# Altium PCB 175-00024_rev1, Backplane, Instrument Crate.PcbDoc (part 1 of 4)
Units mil, origin at the board's own origin, x right, y up, seen from the top; angles counter-clockwise.
Board outline 8400 x 10183.07 mil, 8 copper layers (Top Layer (*.GTL), Mid-Layer 1 (*.G1), +24V (*.GP1), RTN (*.GP2), +3.3V (*.GP3), +12V (*.GP4), Signal GND (*.GP5), Bottom Layer (*.GBL)); 192 components, 150 nets, 1439 pads, 415 vias.
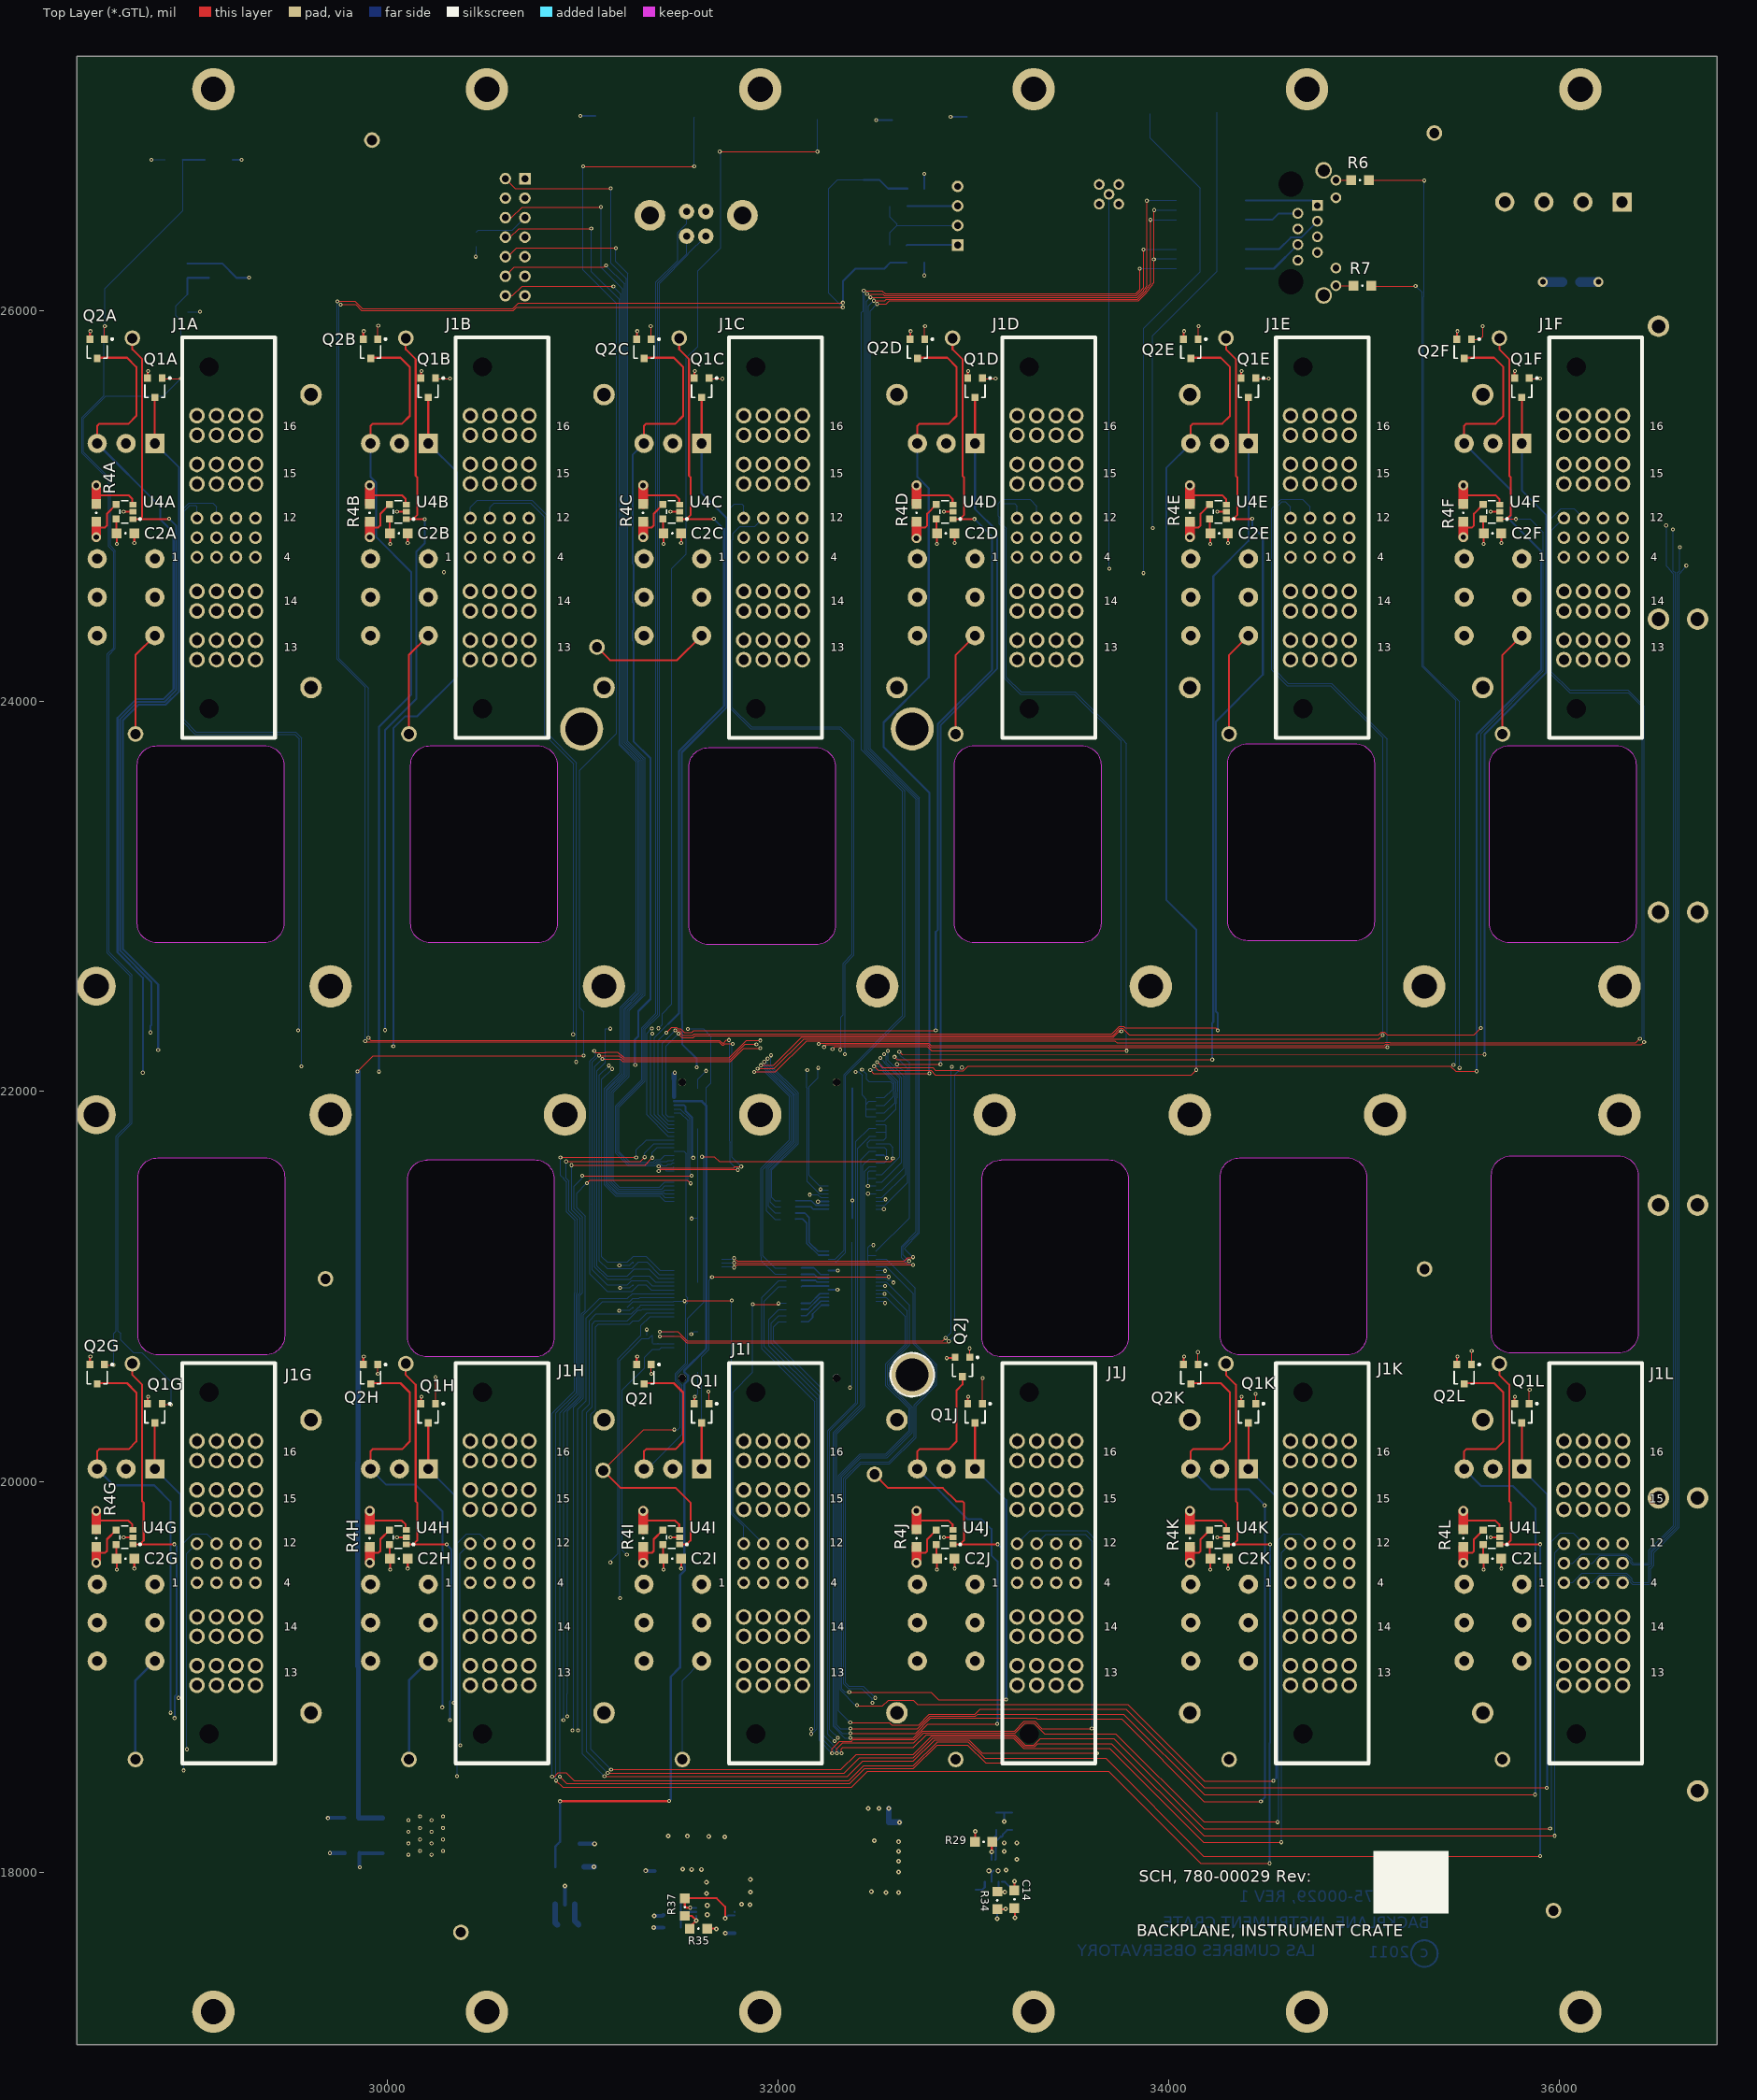
[diagram p0: Top Layer (*.GTL) view]
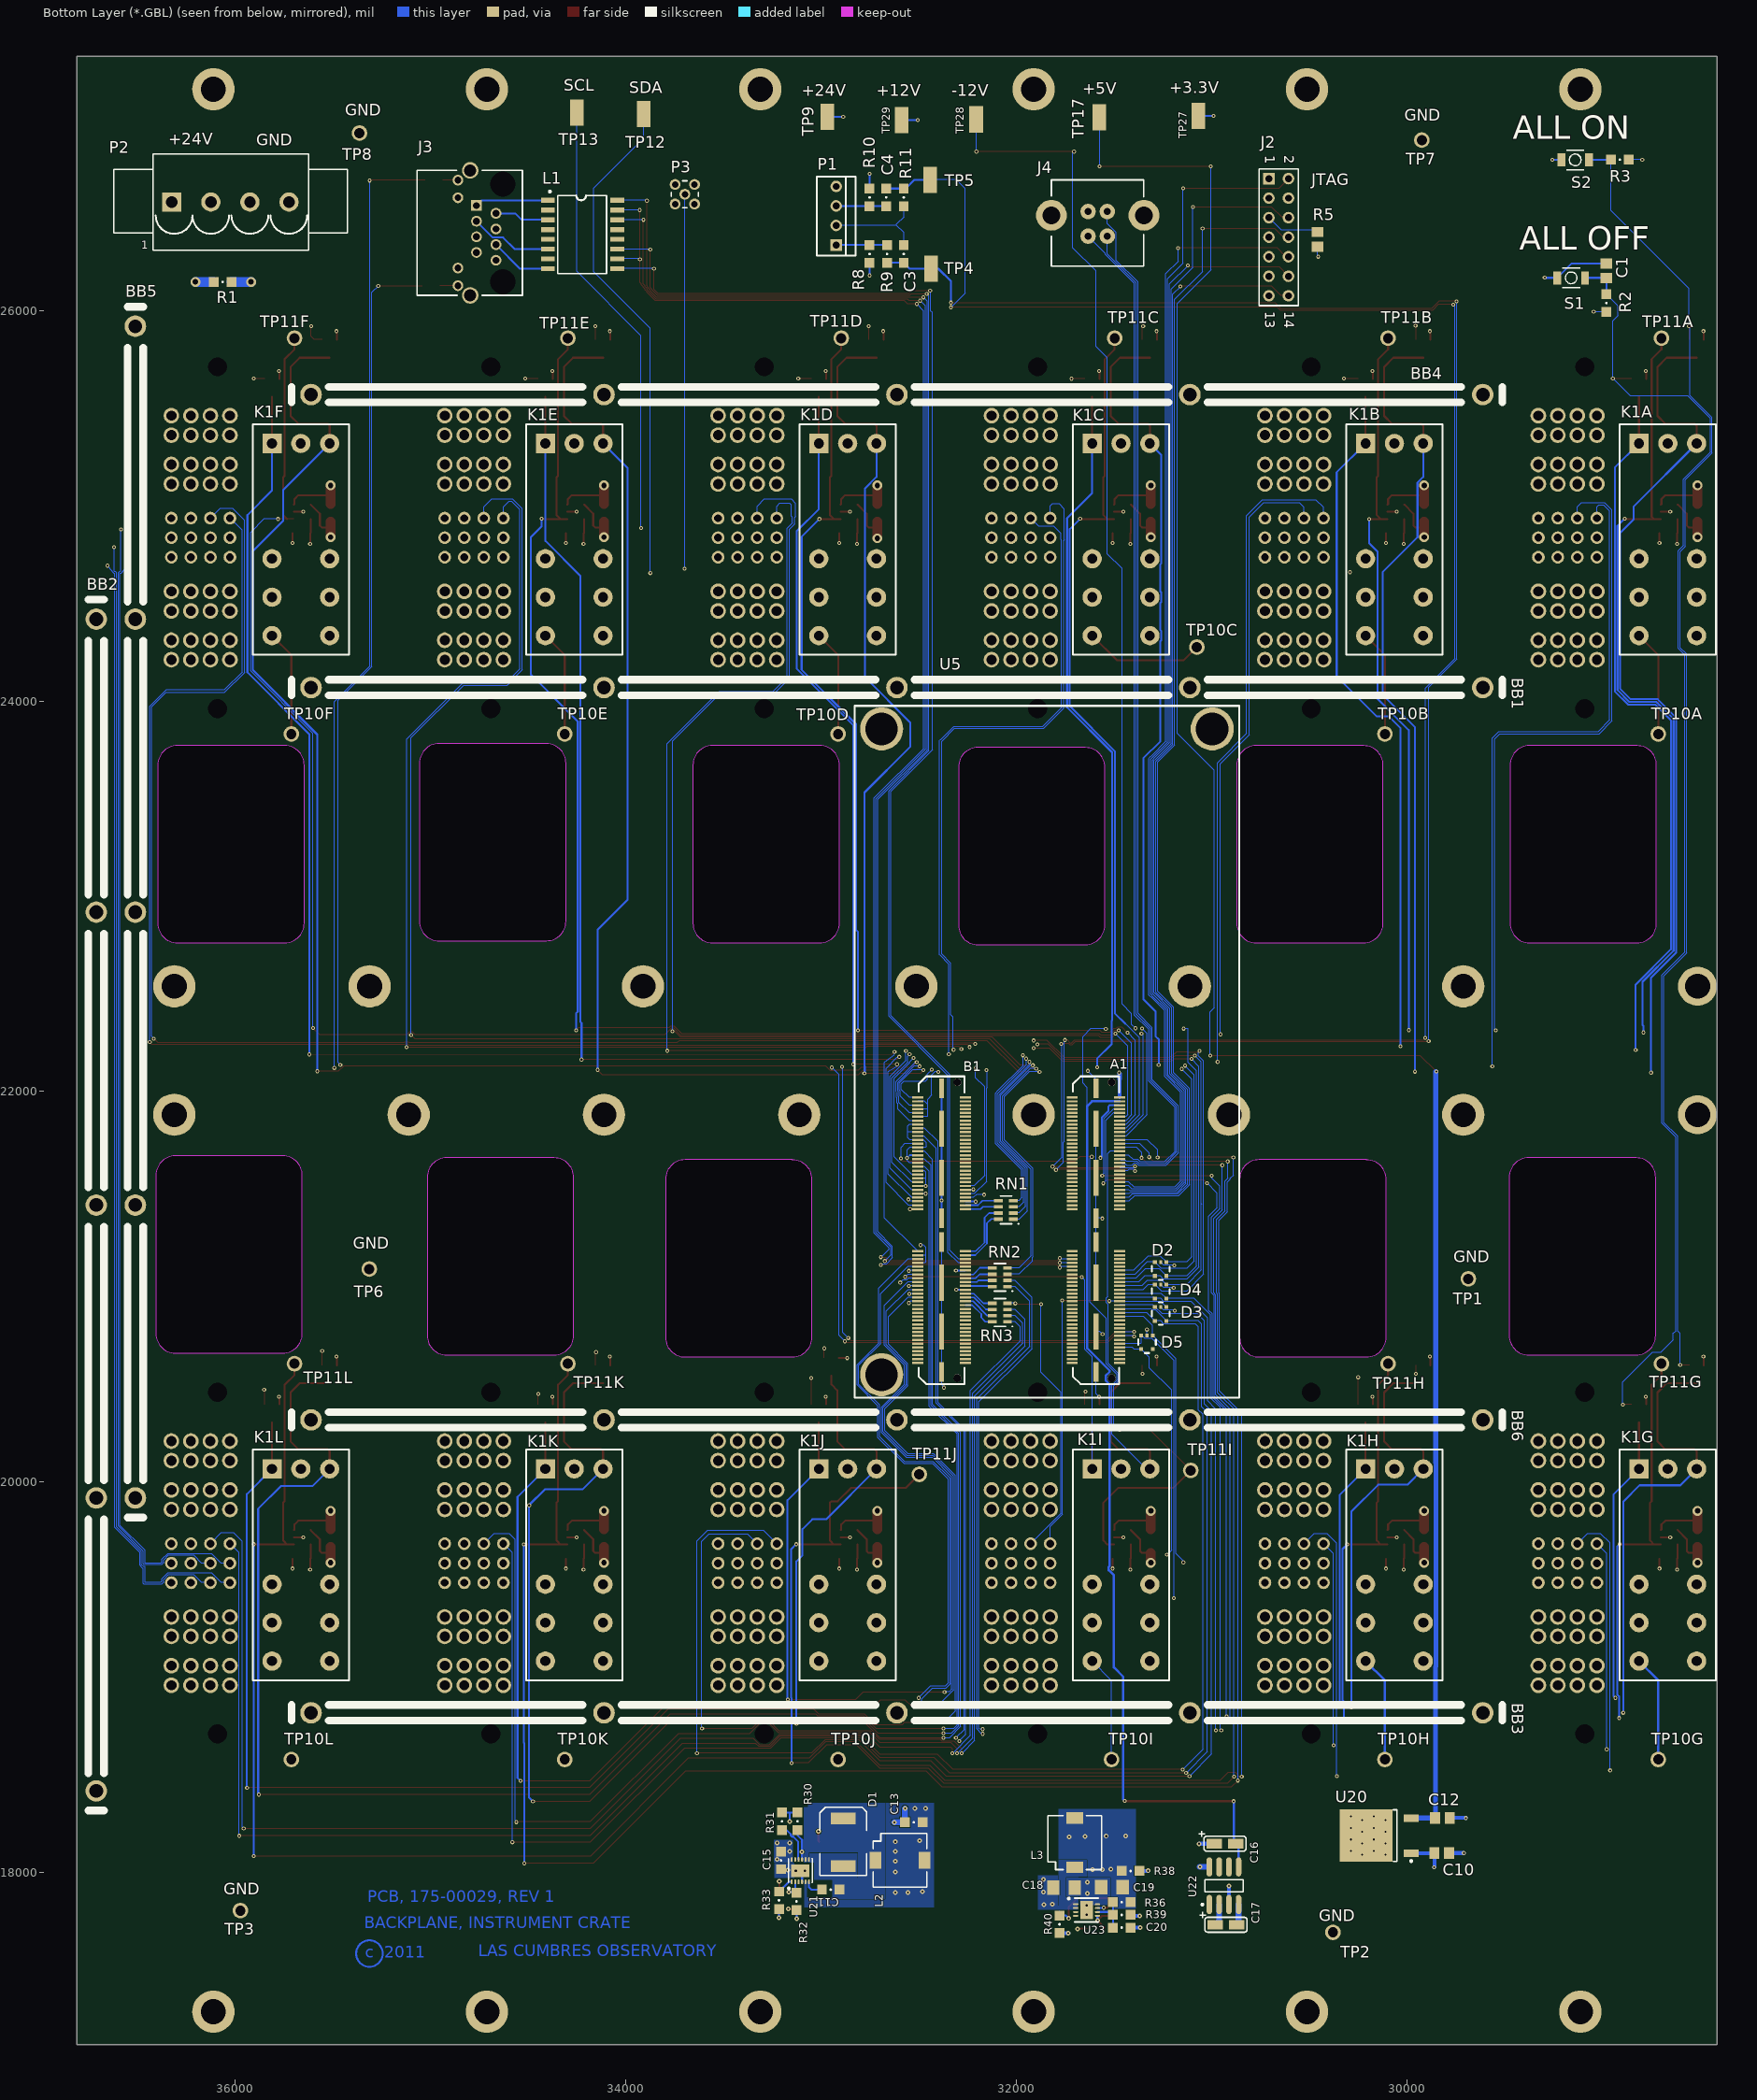
[diagram p1: Bottom Layer (*.GBL) view, seen from below]
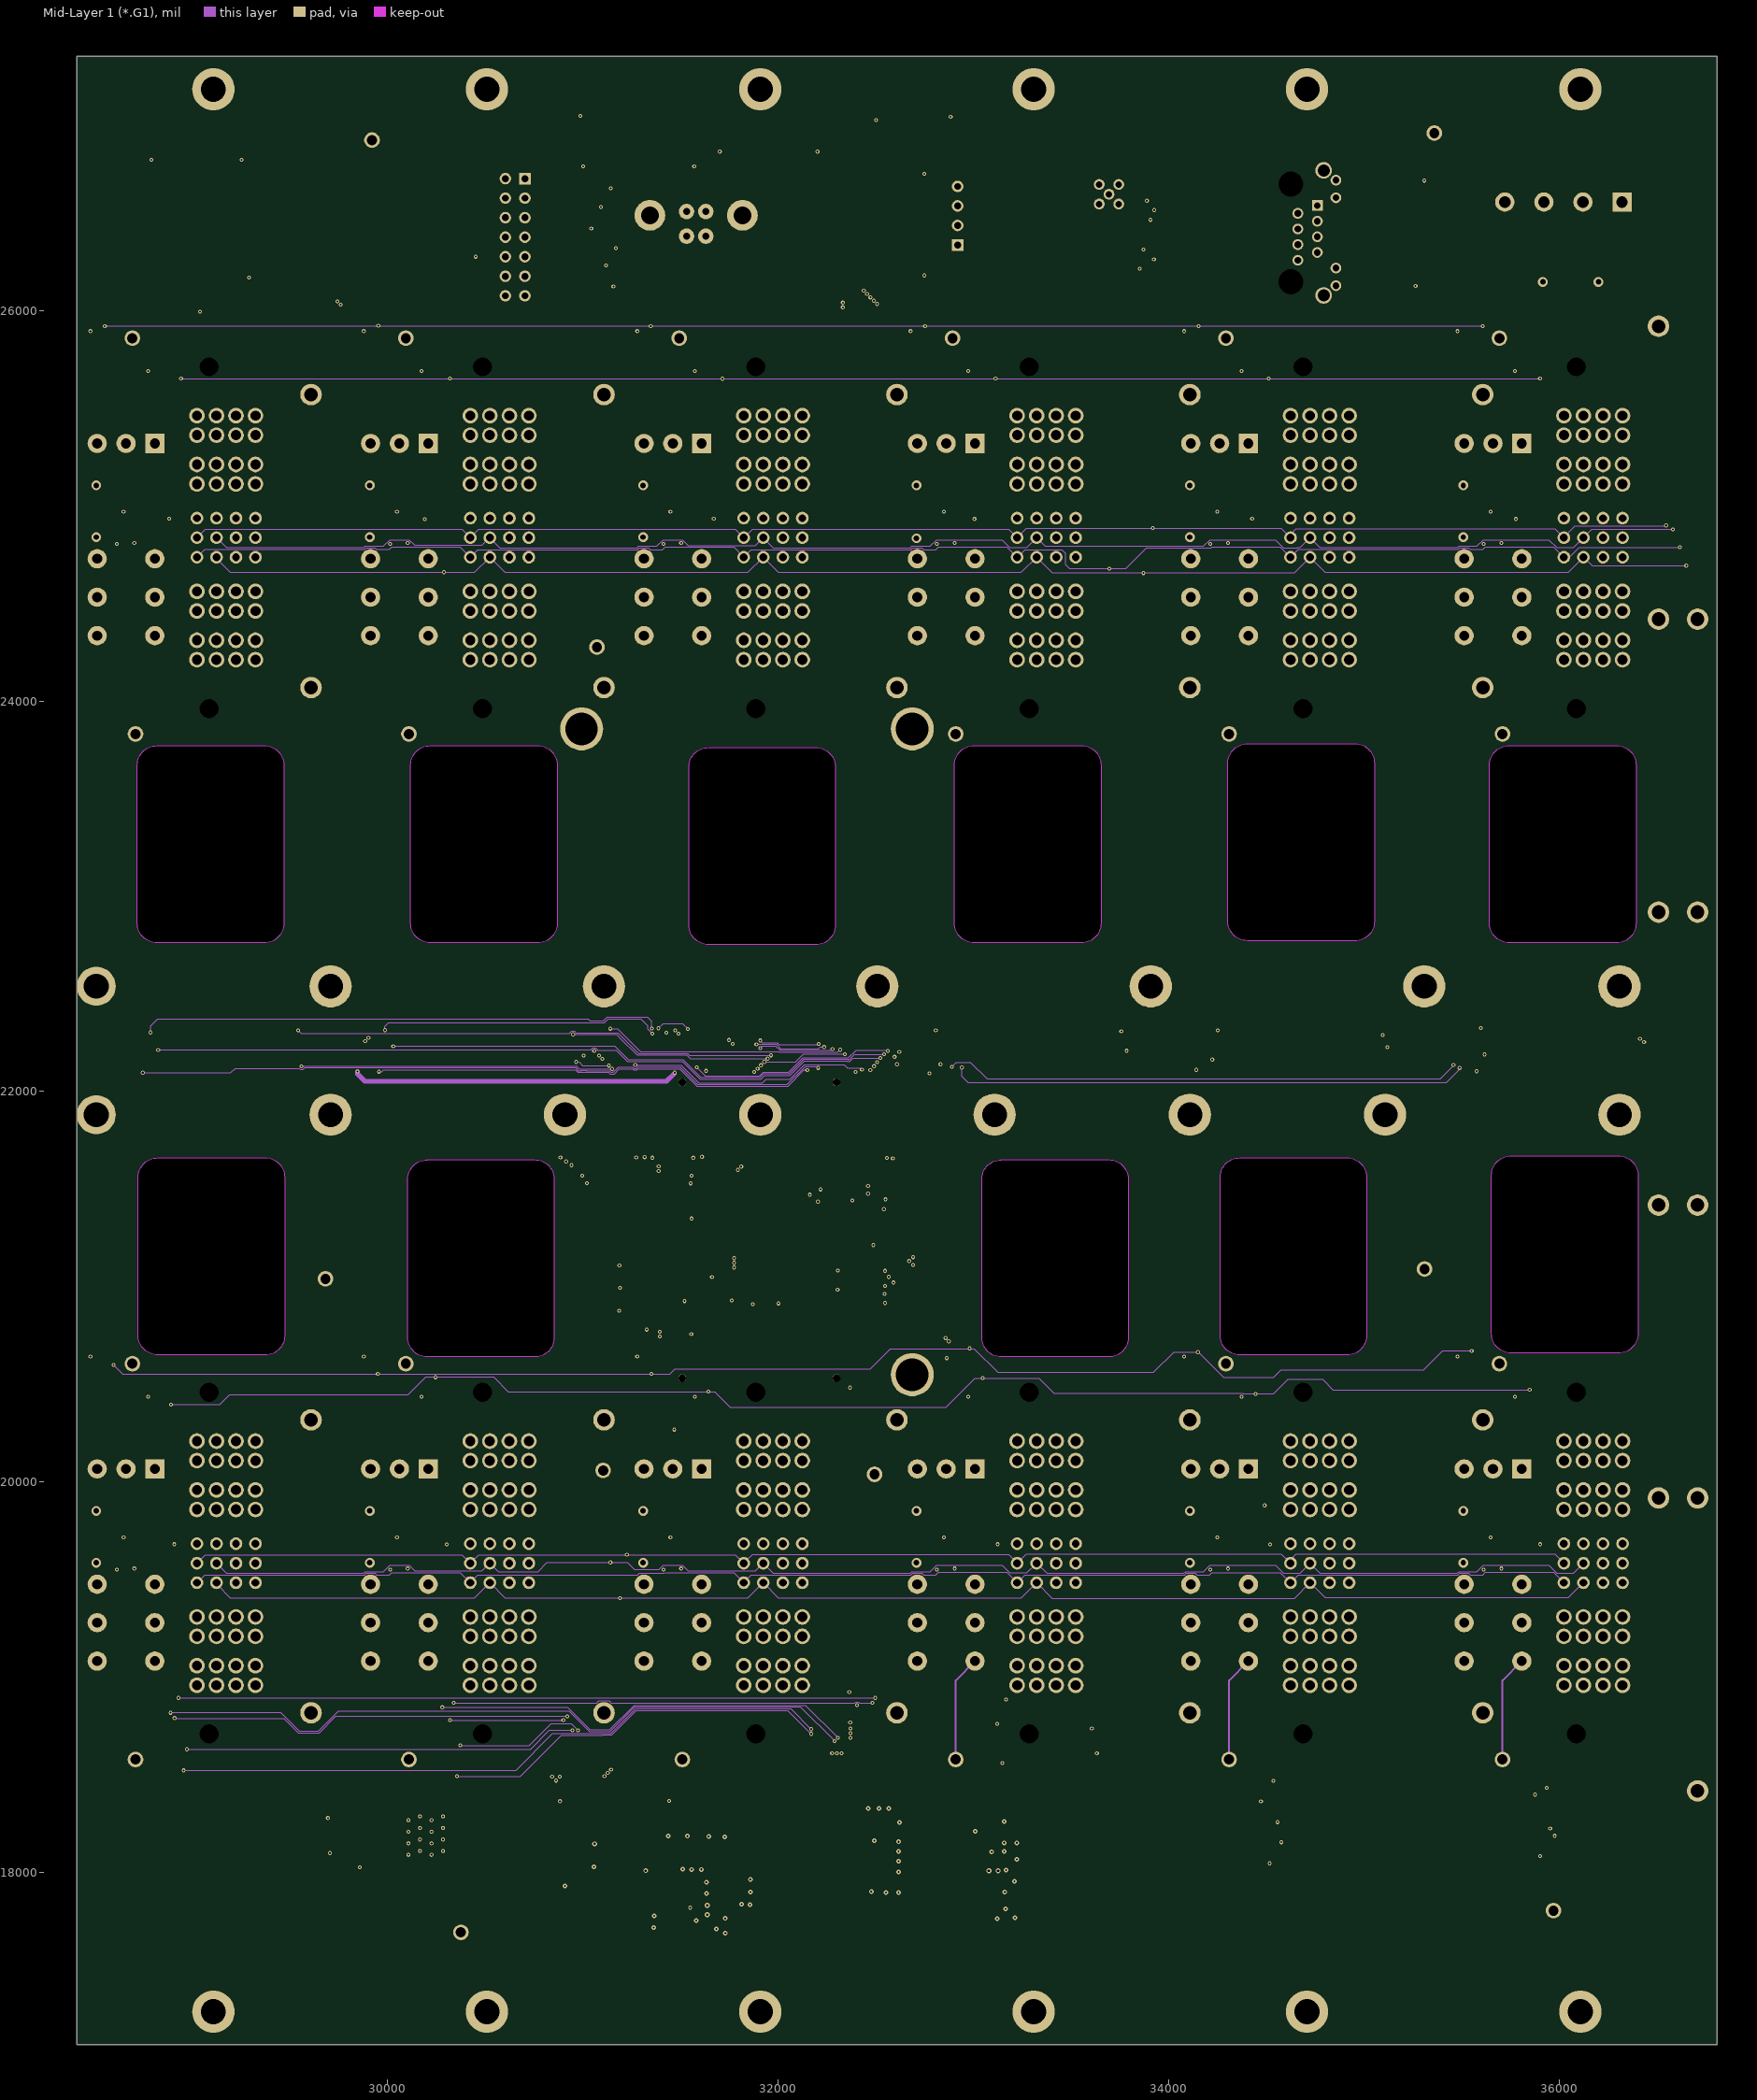
[diagram p2: Mid-Layer 1 (*.G1)]
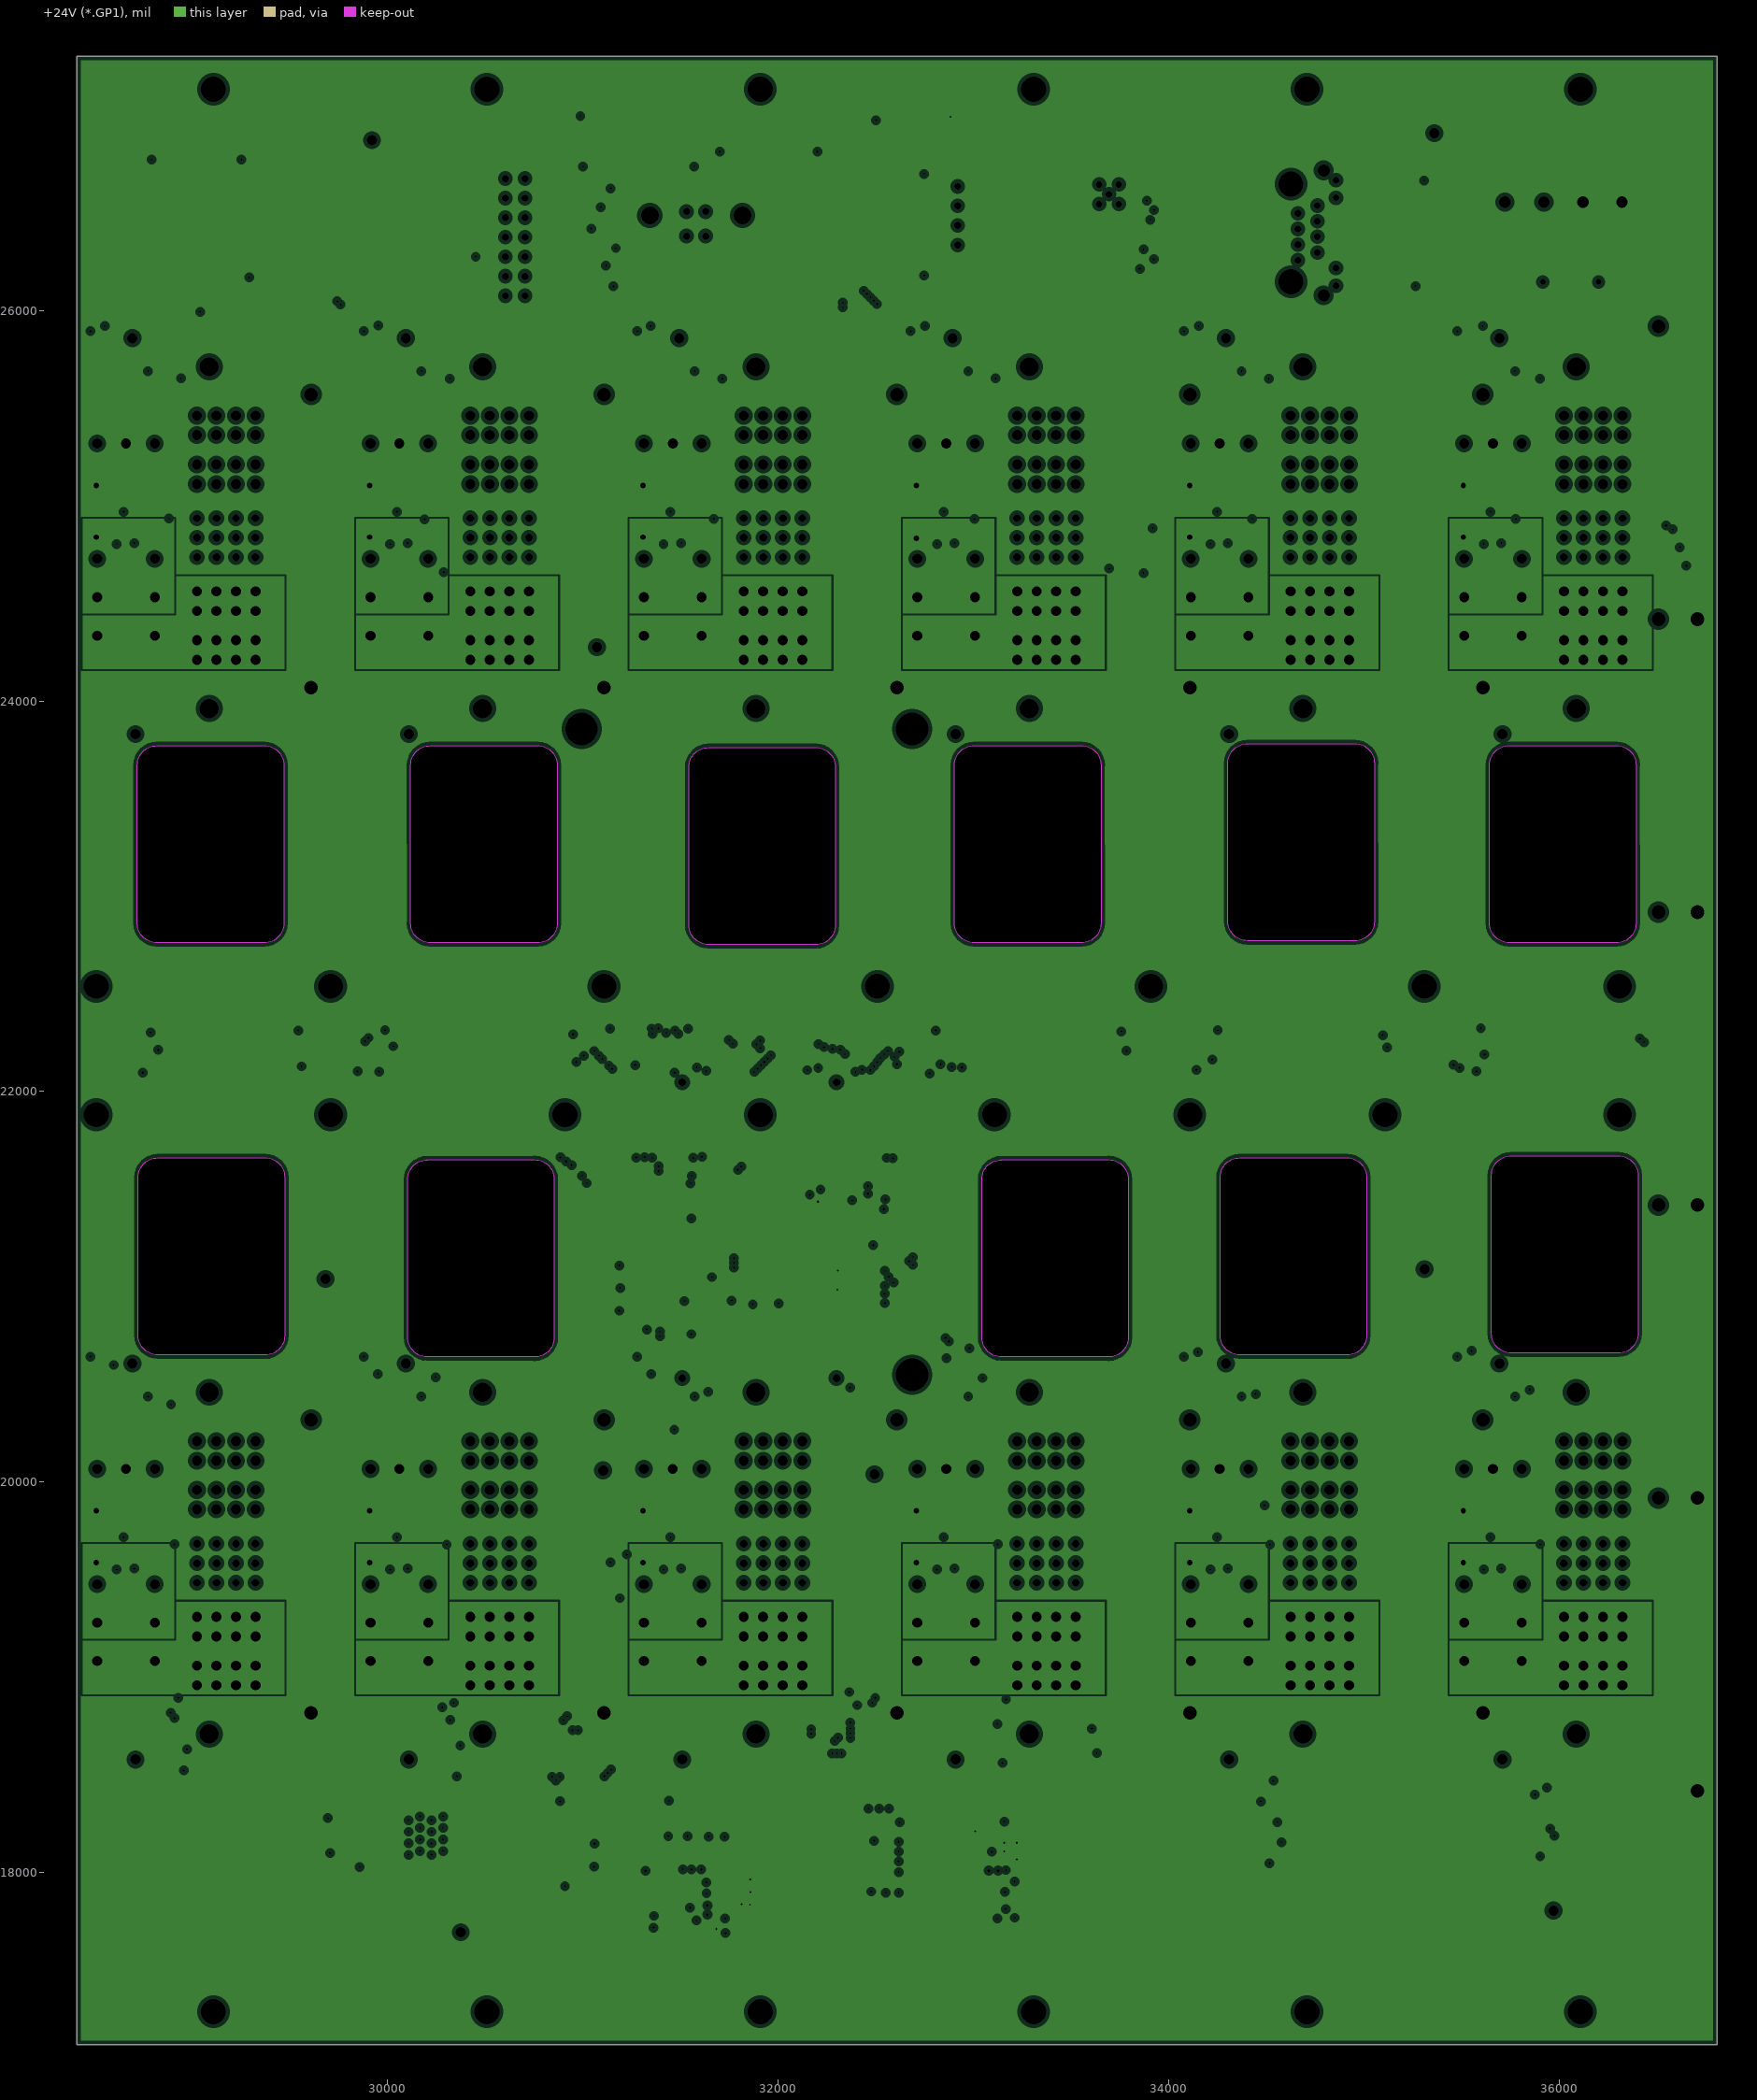
[diagram p3: +24V (*.GP1), clearances drawn from the general rule]
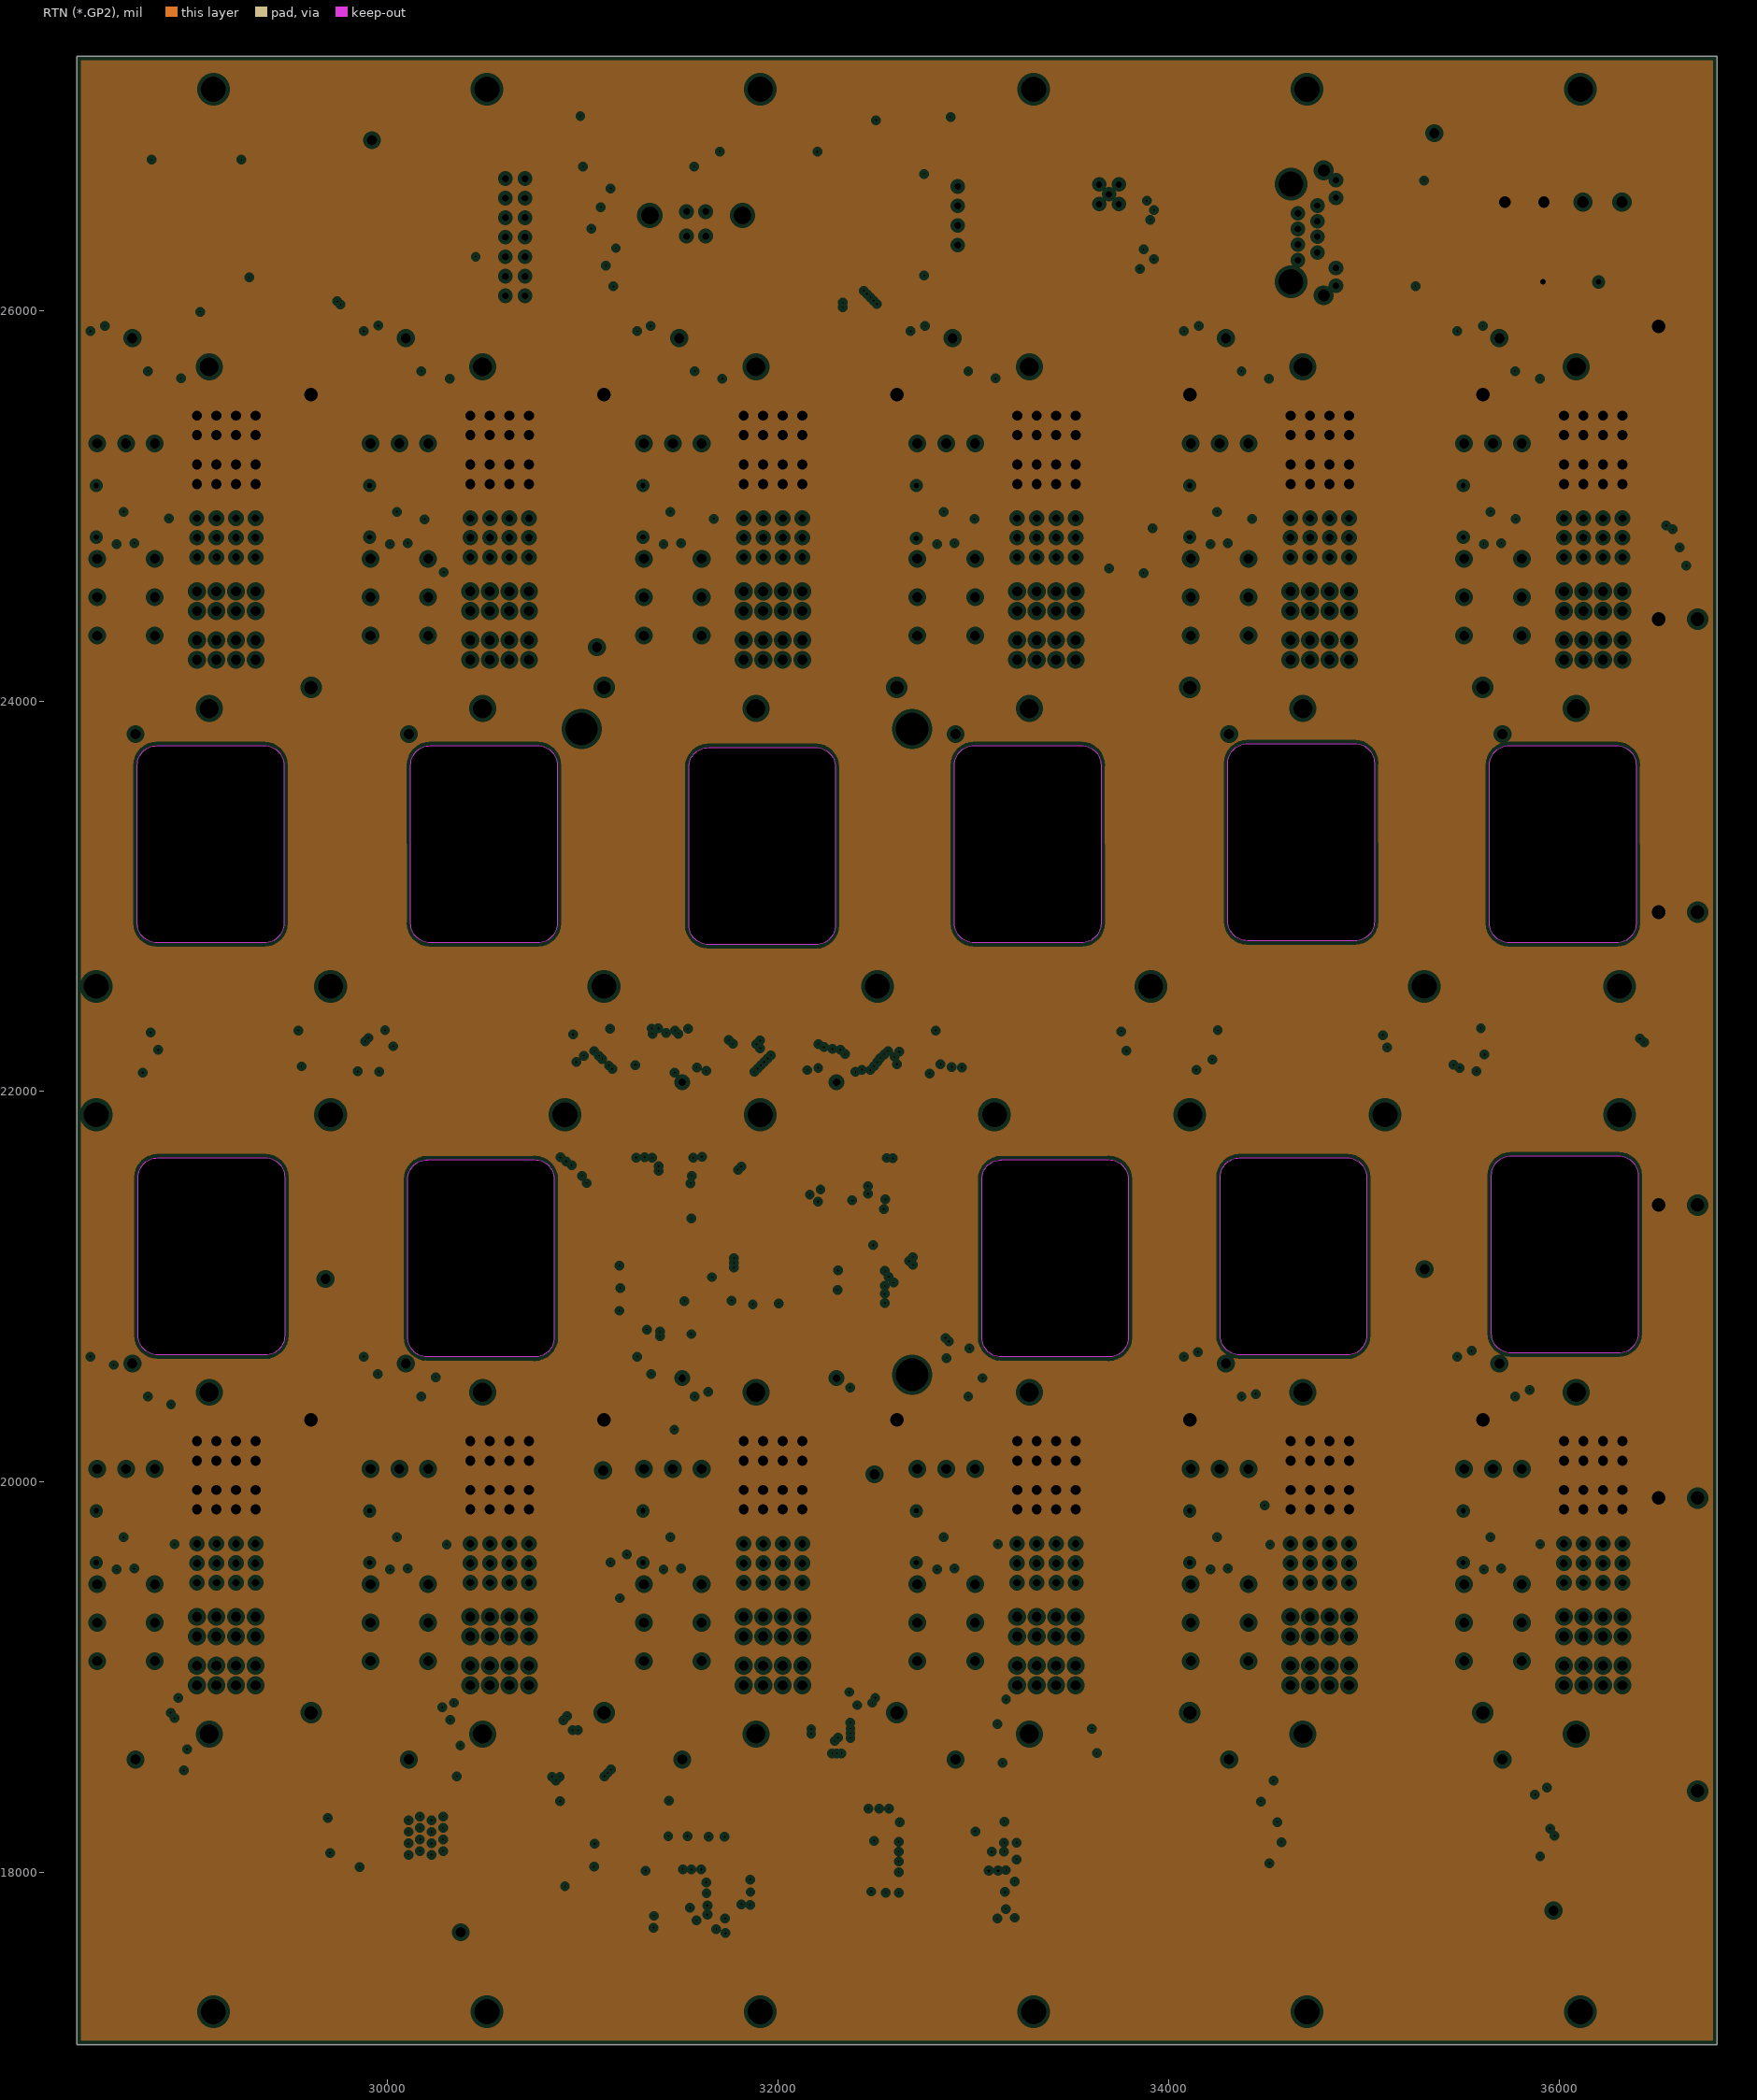
[diagram p4: RTN (*.GP2), clearances drawn from the general rule]
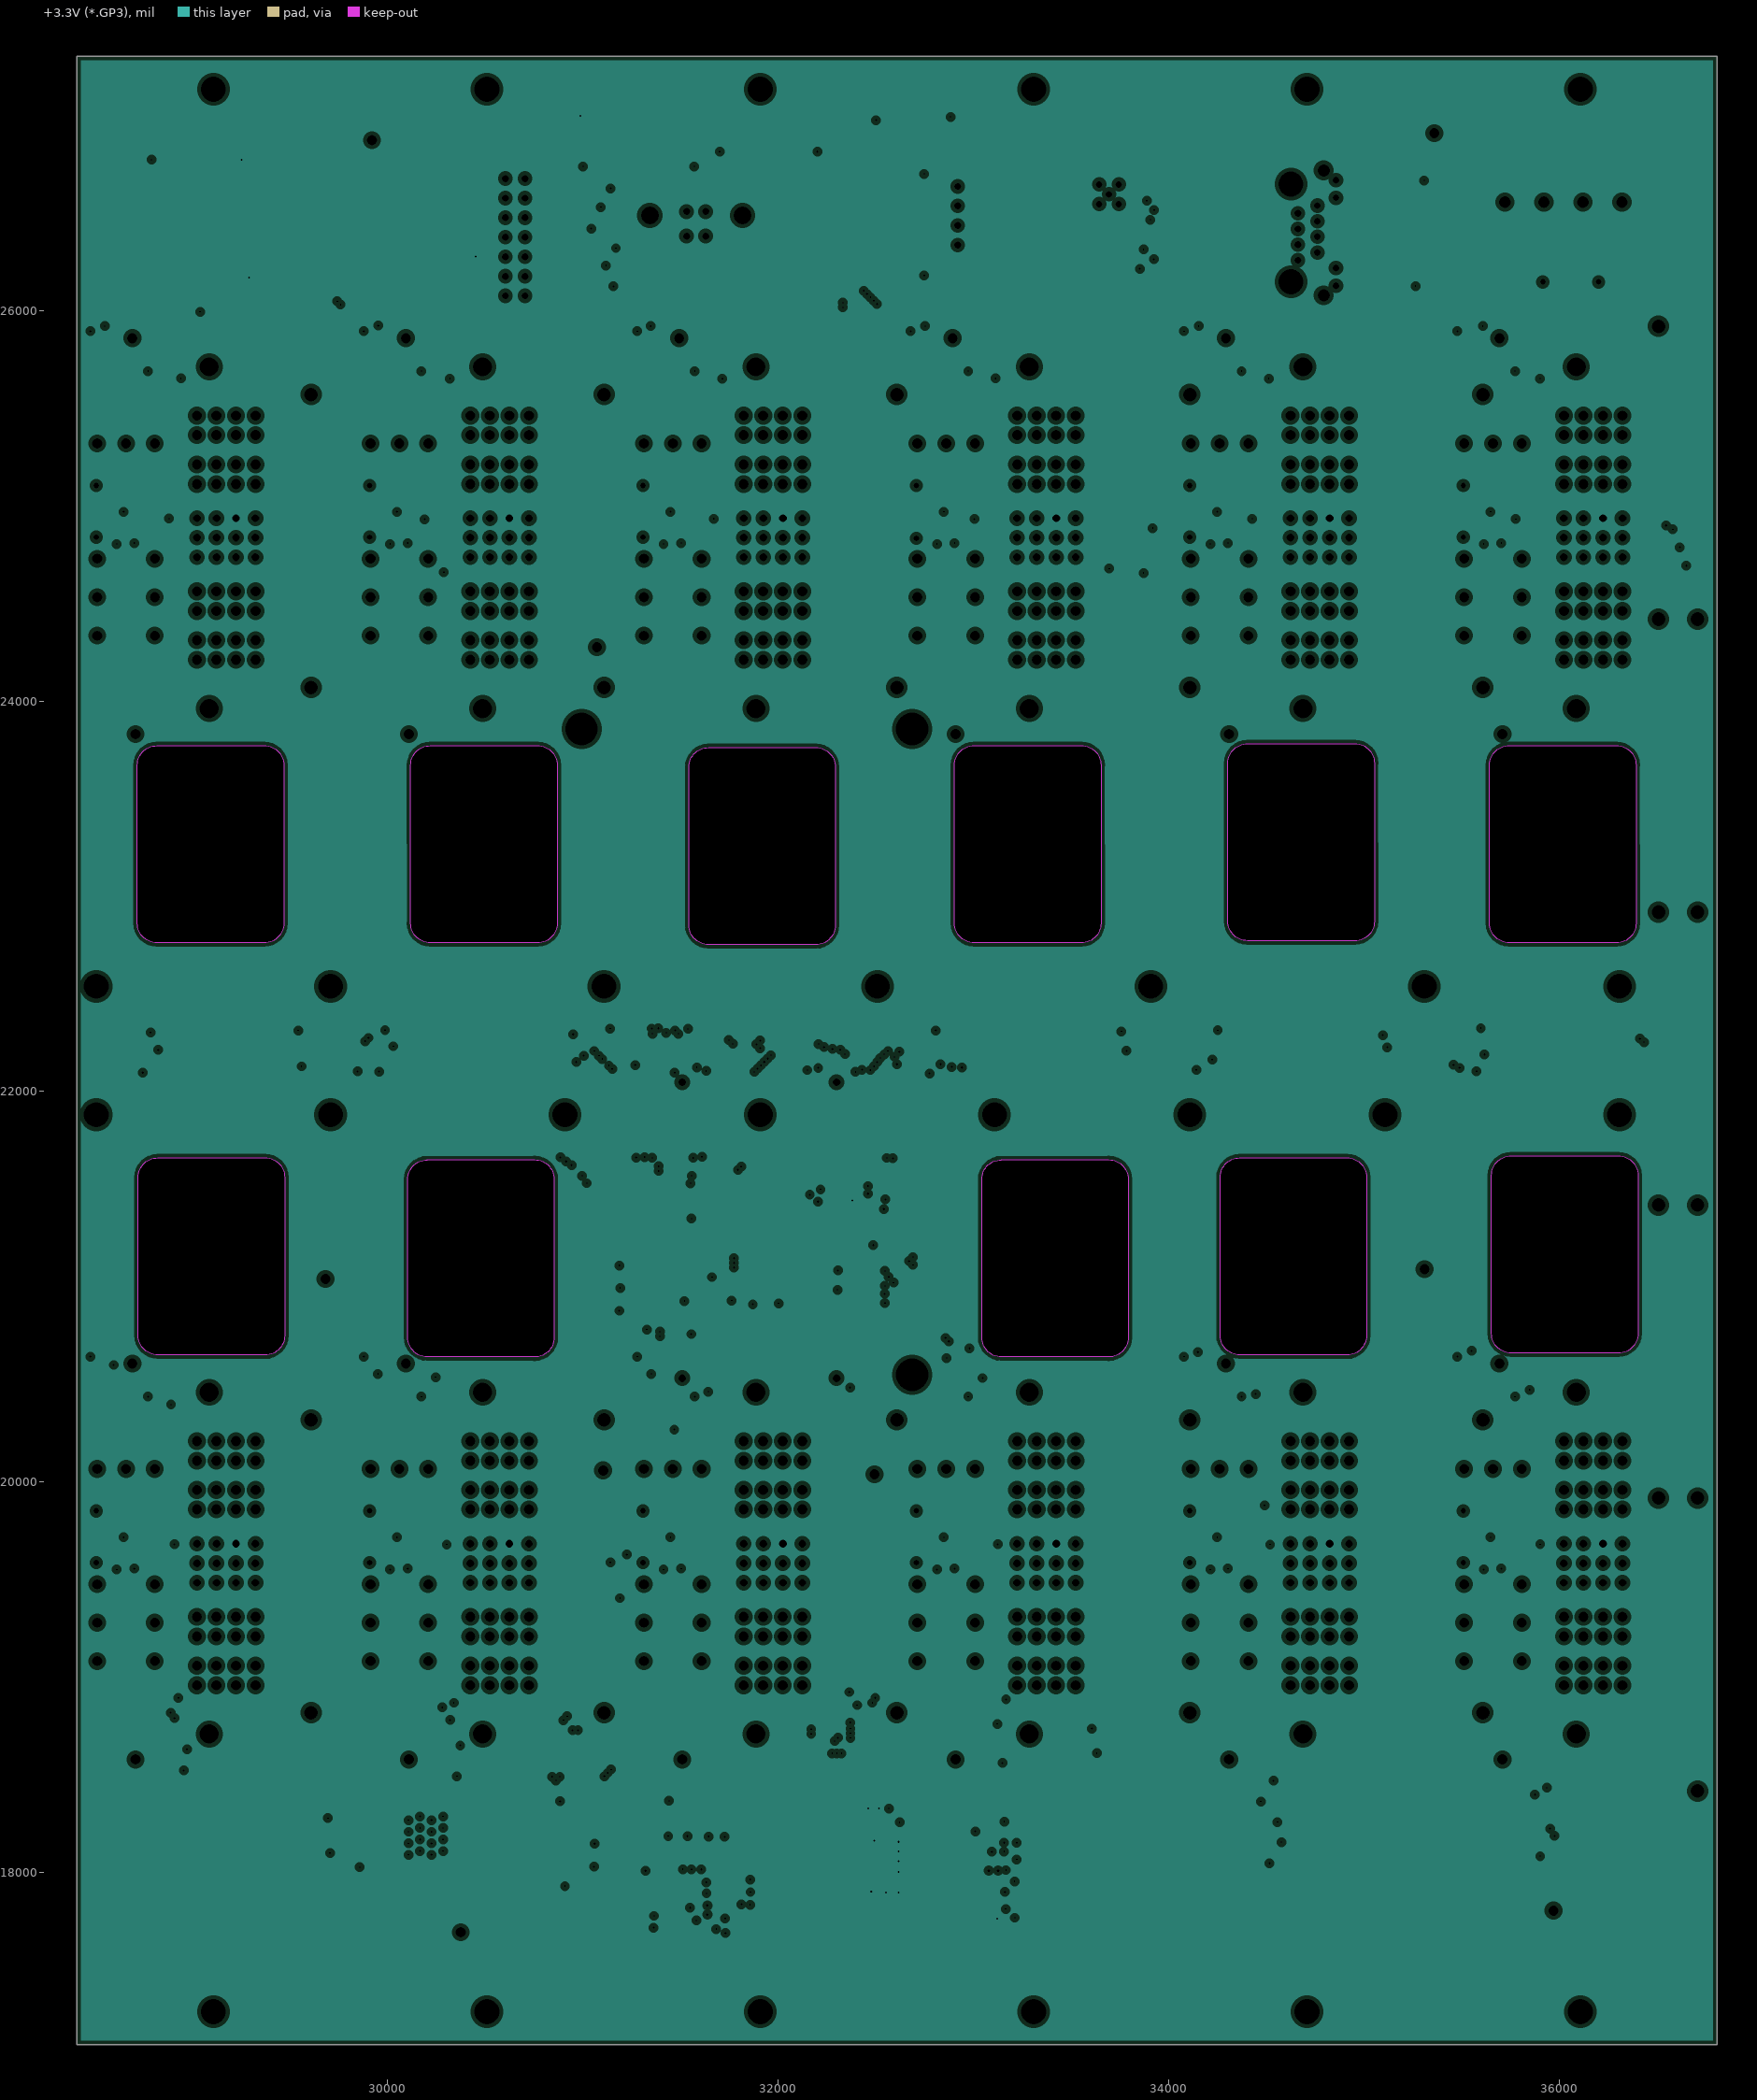
[diagram p5: +3.3V (*.GP3), clearances drawn from the general rule]
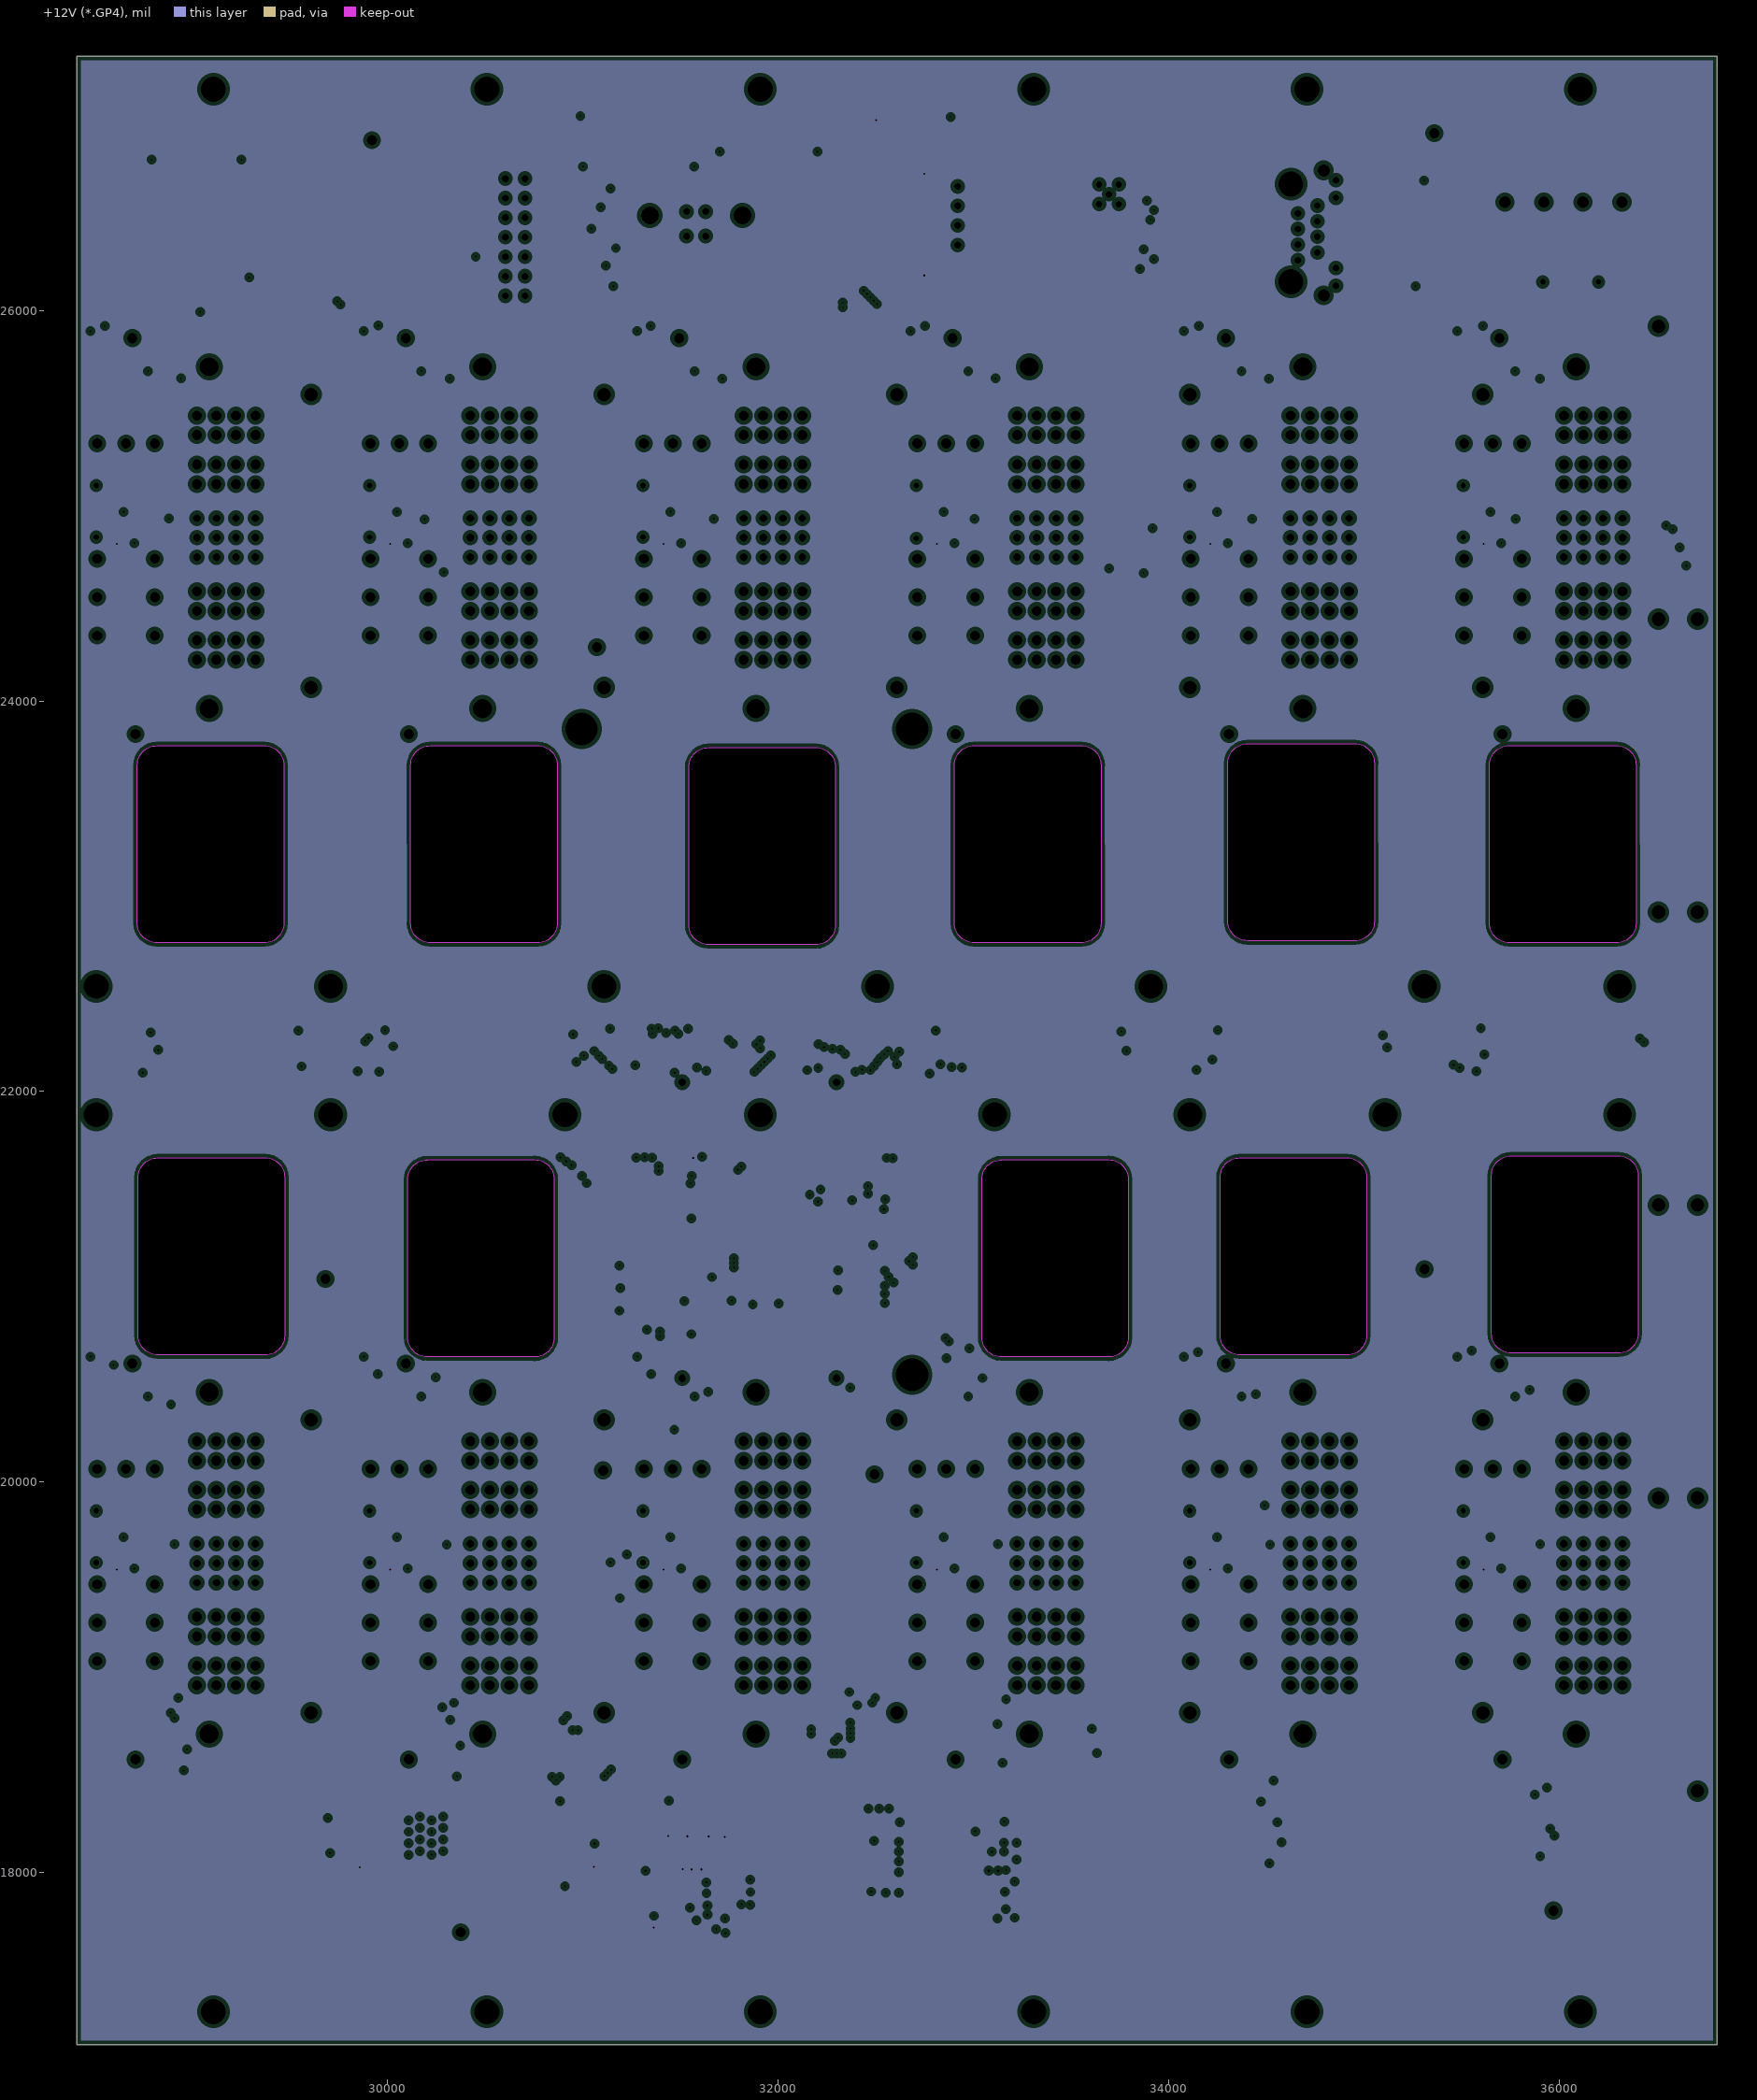
[diagram p6: +12V (*.GP4), clearances drawn from the general rule]
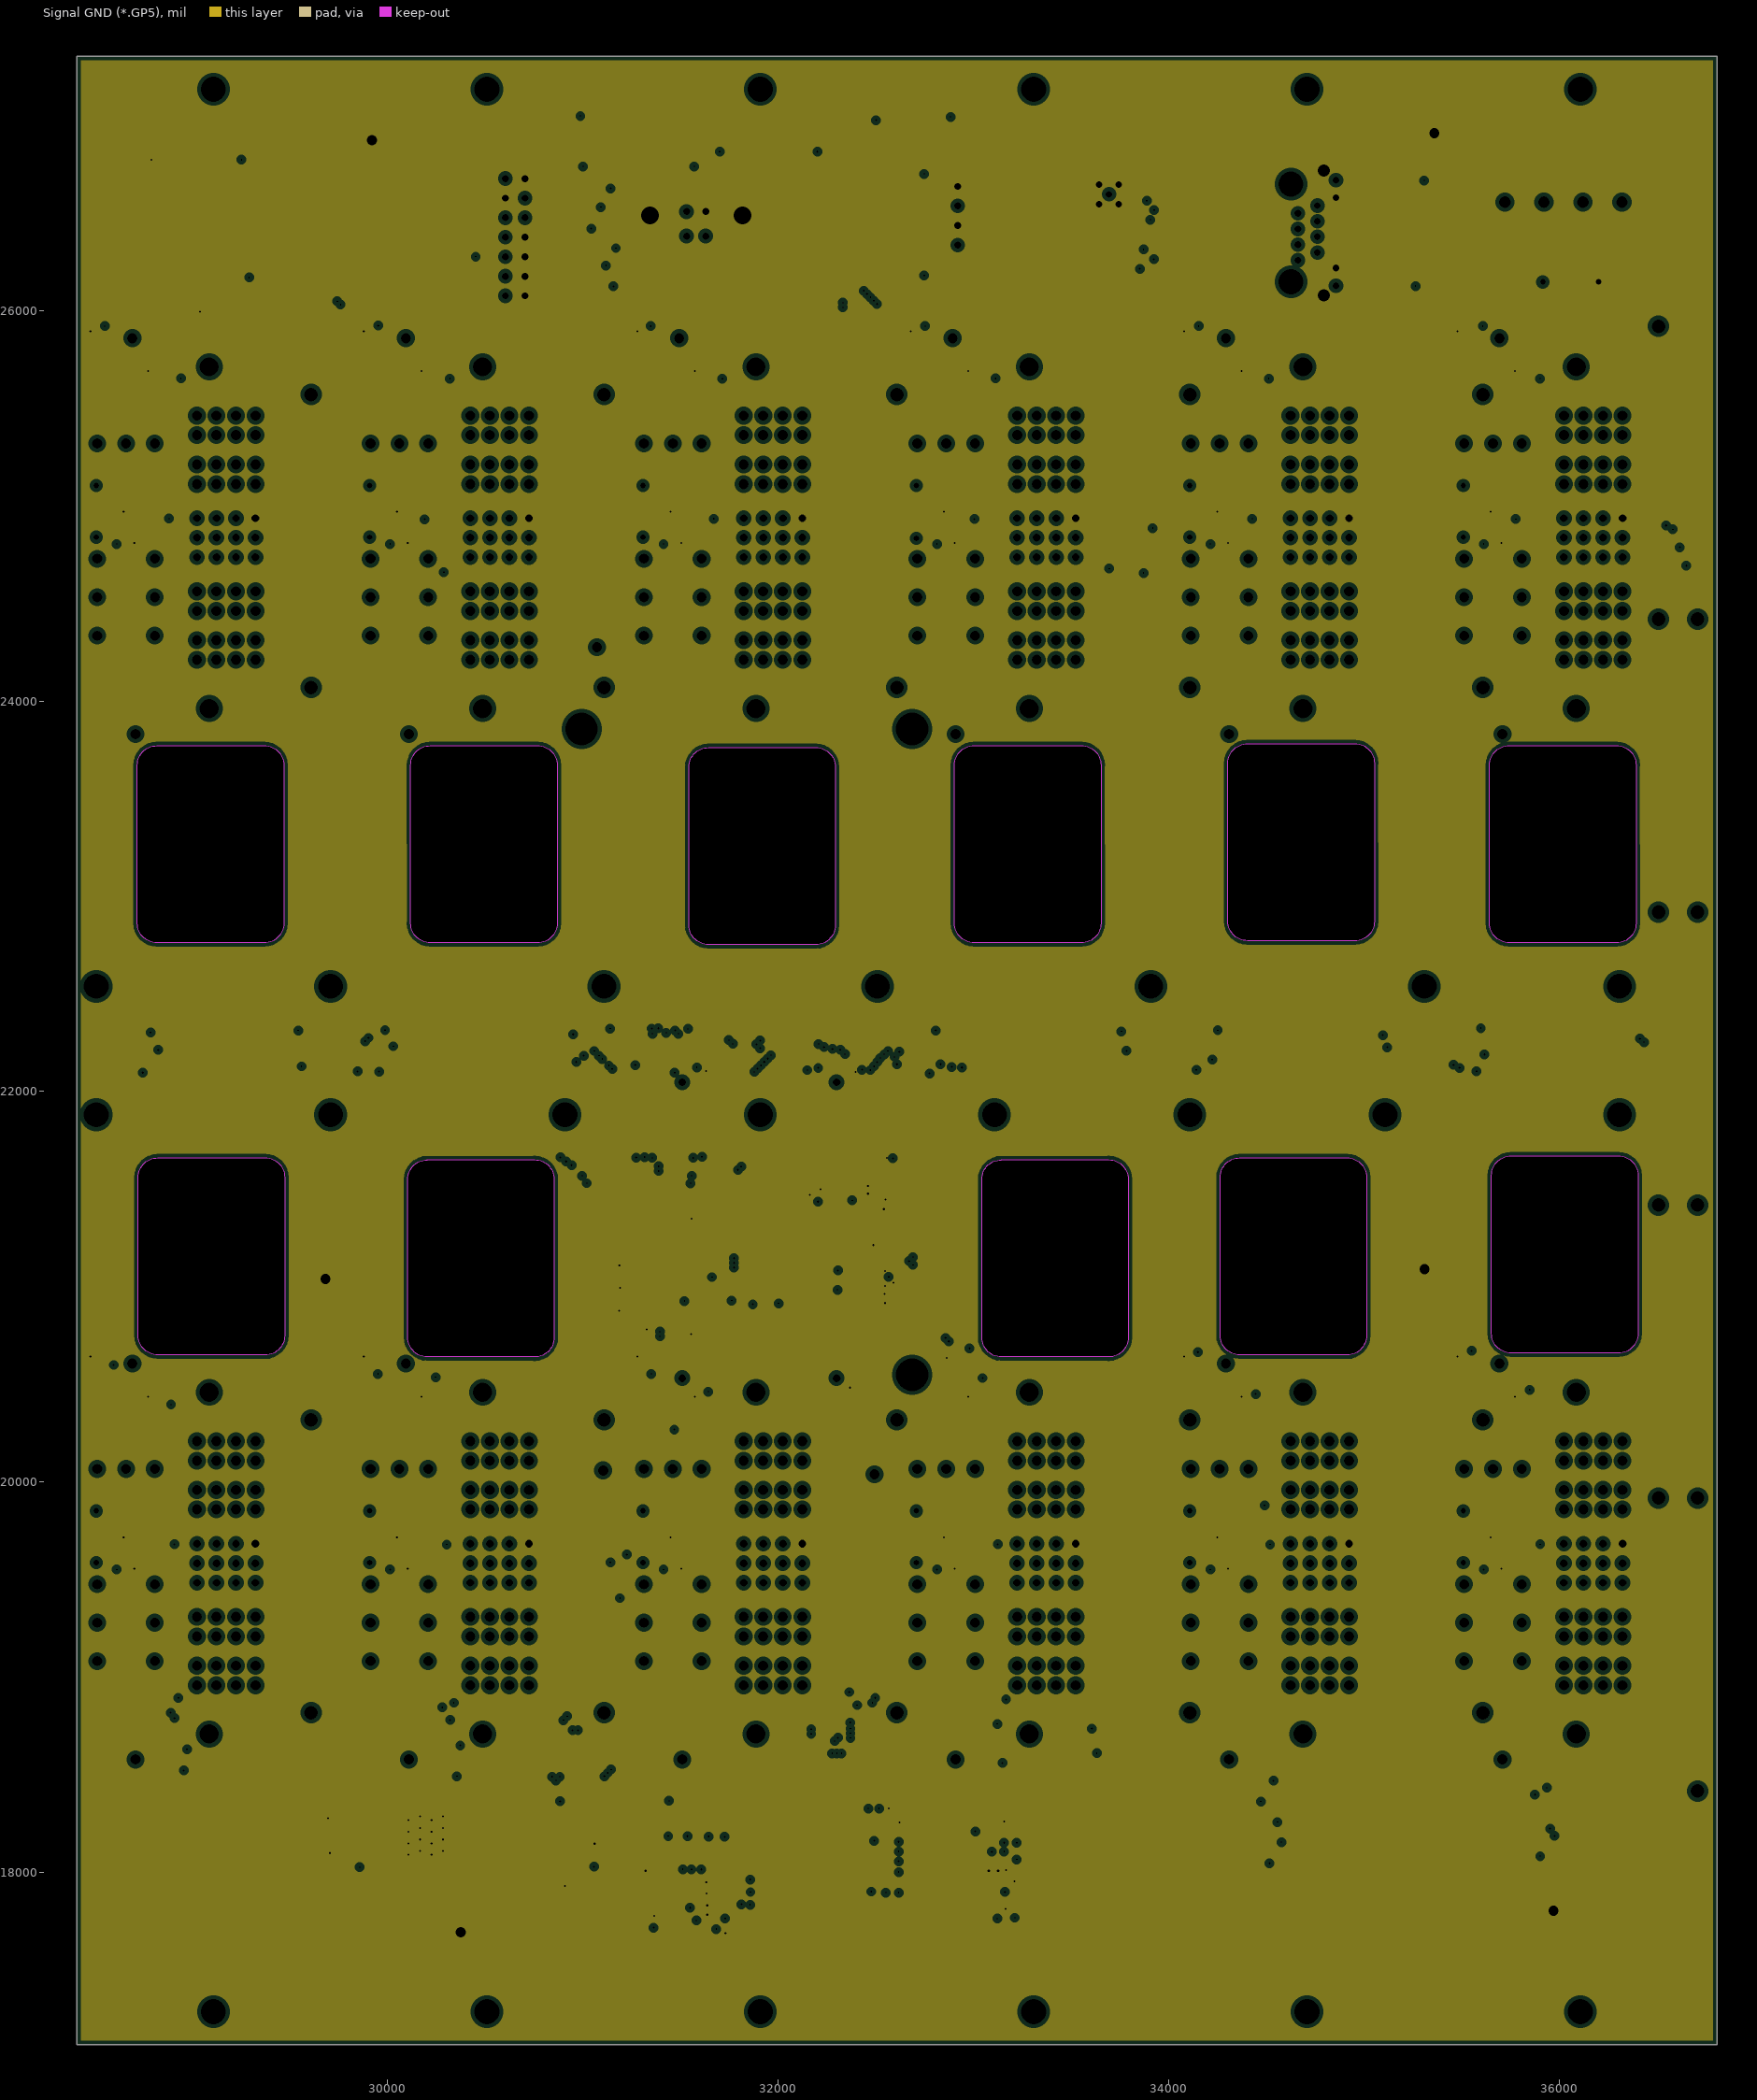
[diagram p7: Signal GND (*.GP5), clearances drawn from the general rule]

## Layer stack, top to bottom
Top Layer (*.GTL): signal copper 1.4
Dielectric: core 12.6, FR-4, Dk 4.8
Mid-Layer 1 (*.G1): signal copper 1.4
Dielectric: prepreg 12.6, FR-4, Dk 4.8
+24V (*.GP1): plane copper 2.8, net (Multiple Nets)
Dielectric: core 12.6, FR-4, Dk 4.8
RTN (*.GP2): plane copper 2.8, net RTN
Dielectric: prepreg 12.6, FR-4, Dk 4.8
+3.3V (*.GP3): plane copper 1.4, net +3.3V
Dielectric: core 12.6, FR-4, Dk 4.8
+12V (*.GP4): plane copper 1.4, net +12V
Dielectric: prepreg 12.6, FR-4, Dk 4.8
Signal GND (*.GP5): plane copper 1.4, net GND
Dielectric: core 12.6, FR-4, Dk 4.8
Bottom Layer (*.GBL): signal copper 1.4

## Board outline
28410,17119 36810,17119 36810,27302.07 28410,27302.07
cut-out: 30120.24,22862.08 30120.24,23671.11 cw(c30220.24,23671.11) 30220.24,23771.11 30220.73,23771.6 30770.24,23771.6 cw(c30770.24,23671.6) 30870.24,23671.6 30870.24,22861.6 cw(c30770.24,22861.6) 30770.24,22761.6 30221.21,22761.6 30220.24,22762.08 cw(c30220.24,22862.08)
cut-out: 31544.76,22852.32 31544.76,23661.36 cw(c31644.76,23661.36) 31644.76,23761.36 31645.24,23761.84 32194.76,23761.84 cw(c32194.76,23661.84) 32294.76,23661.84 32294.76,22851.84 cw(c32194.76,22851.84) 32194.76,22751.84 31645.72,22751.84 31644.76,22752.32 cw(c31644.76,22852.32)
cut-out: 32904.76,22862.32 32904.76,23671.36 cw(c33004.76,23671.36) 33004.76,23771.36 33005.24,23771.84 33554.76,23771.84 cw(c33554.76,23671.84) 33654.76,23671.84 33654.76,22861.84 cw(c33554.76,22861.84) 33554.76,22761.84 33005.72,22761.84 33004.76,22762.32 cw(c33004.76,22862.32)
cut-out: 34304.76,22872.32 34304.76,23681.36 cw(c34404.76,23681.36) 34404.76,23781.36 34405.24,23781.84 34954.76,23781.84 cw(c34954.76,23681.84) 35054.76,23681.84 35054.76,22871.84 cw(c34954.76,22871.84) 34954.76,22771.84 34405.72,22771.84 34404.76,22772.32 cw(c34404.76,22872.32)
cut-out: 35644.76,22862.32 35644.76,23671.36 cw(c35744.76,23671.36) 35744.76,23771.36 35745.24,23771.84 36294.76,23771.84 cw(c36294.76,23671.84) 36394.76,23671.84 36394.76,22861.84 cw(c36294.76,22861.84) 36294.76,22761.84 35745.72,22761.84 35744.76,22762.32 cw(c35744.76,22862.32)
cut-out: 28724.76,20751.36 28724.76,21560.39 cw(c28824.76,21560.39) 28824.76,21660.39 28825.24,21660.88 29374.76,21660.88 cw(c29374.76,21560.88) 29474.76,21560.88 29474.76,20750.88 cw(c29374.76,20750.88) 29374.76,20650.88 28825.72,20650.88 28824.76,20651.36 cw(c28824.76,20751.36)
cut-out: 30104.76,20741.36 30104.76,21550.39 cw(c30204.76,21550.39) 30204.76,21650.39 30205.24,21650.88 30754.76,21650.88 cw(c30754.76,21550.88) 30854.76,21550.88 30854.76,20740.88 cw(c30754.76,20740.88) 30754.76,20640.88 30205.72,20640.88 30204.76,20641.36 cw(c30204.76,20741.36)
cut-out: 33044.76,20741.36 33044.76,21550.39 cw(c33144.76,21550.39) 33144.76,21650.39 33145.24,21650.88 33694.76,21650.88 cw(c33694.76,21550.88) 33794.76,21550.88 33794.76,20740.88 cw(c33694.76,20740.88) 33694.76,20640.88 33145.72,20640.88 33144.76,20641.36 cw(c33144.76,20741.36)
cut-out: 34265.24,20751.36 34265.24,21560.39 cw(c34365.24,21560.39) 34365.24,21660.39 34365.73,21660.88 34915.24,21660.88 cw(c34915.24,21560.88) 35015.24,21560.88 35015.24,20750.88 cw(c34915.24,20750.88) 34915.24,20650.88 34366.21,20650.88 34365.24,20651.36 cw(c34365.24,20751.36)
cut-out: 35654.76,20761.36 35654.76,21570.39 cw(c35754.76,21570.39) 35754.76,21670.39 35755.24,21670.88 36304.76,21670.88 cw(c36304.76,21570.88) 36404.76,21570.88 36404.76,20760.88 cw(c36304.76,20760.88) 36304.76,20660.88 35755.72,20660.88 35754.76,20661.36 cw(c35754.76,20761.36)
cut-out: 28720.24,22862.08 28720.24,23671.11 cw(c28820.24,23671.11) 28820.24,23771.11 28820.73,23771.6 29370.24,23771.6 cw(c29370.24,23671.6) 29470.24,23671.6 29470.24,22861.6 cw(c29370.24,22861.6) 29370.24,22761.6 28821.21,22761.6 28820.24,22762.08 cw(c28820.24,22862.08)

## Design rules (kind name [scope] priority, off if disabled: settings)
Clearance [All] p1: gap=4
ComponentClearance "Clearance SF Module" [InComponent('U5')] p1: gap=0 collisioncheckmode=3 verticalgap=-700 showdistances=FALSE
ComponentClearance "Clearance Backplane Header" [HasFootprint('PESC-02-12-02-01-S-VT-LC')] p2: gap=-10 collisioncheckmode=3 verticalgap=-700 showdistances=FALSE
ComponentClearance [All] p3: gap=5 collisioncheckmode=3 verticalgap=10 showdistances=FALSE
HoleSize [All] p1: absolutevalues=TRUE maxlimit=300 minlimit=1 maxpercent=80.000 minpercent=20.000
MinimumSolderMaskSliver [All] p1: minsoldermaskwidth=1
PlaneClearance [All] p1: clearance=20
PlaneConnect "High Current" [(InNet('NetJ1A_13')OR InNet('NetJ1B_13')OR InNet('NetJ1C_13')OR InNet('NetJ1D_13')OR InNet('NetJ1E_13')OR InNet('NetJ1F_13')OR InNet('NetJ1G_13')OR InNet('NetJ1H_13')OR InNet('NetJ1I_13')OR InNet('NetJ1J_13')OR InNet('NetJ1K_13')OR InNet('NetJ1L_13') OR InNet('NetK1A_11')OR InNet('NetK1B_11')OR InNet('NetK1C_11')OR InNet('NetK1D_11')OR InNet('NetK1E_11')OR InNet('NetK1F_11')OR InNet('NetK1G_11')OR InNet('NetK1H_11')OR InNet('NetK1I_11')OR InNet('NetK1J_11')OR InNet('NetK1K_11')OR InNet('NetK1L_11')or InNet('+24V')or InNet('RTN'))] p1: planeconnectstyle=Relief reliefexpansion=20 reliefentries=4 reliefconductorwidth=30 reliefairgap=10
PlaneConnect [All] p2: planeconnectstyle=Relief reliefexpansion=20 reliefentries=4 reliefconductorwidth=10 reliefairgap=10
PolygonConnect [All] p1: connectstyle=Direct reliefconductorwidth=10 reliefentries=4 polygonreliefangle="90 Angle"
RoomDefinition "780-00029,rev1,Pg3,Backplane, Instrument Crate" [InComponentClass('780-00029,rev1,Pg3,Backplane, Instrument Crate')] p1: confinementstyle=ConfineIn formatcopy=TRUE lockcomponents=FALSE outline 28829,20427 35077,20427 35077,27090 28829,27090
RoomDefinition "Power Supplies" [InComponentClass('Power Supplies')] p2: confinementstyle=ConfineIn formatcopy=TRUE lockcomponents=FALSE outline 27505,16631.6 39930,16631.6 39930,27809 27505,27809
RoomDefinition BackplaneSlot12 [InComponentClass('BackplaneSlot12')] p3: confinementstyle=ConfineIn formatcopy=TRUE lockcomponents=FALSE outline 35379.99,18507.82 36579.99,18507.82 36579.99,20657.82 35379.99,20657.82
RoomDefinition BackplaneSlot11 [InComponentClass('BackplaneSlot11')] p4: confinementstyle=ConfineIn formatcopy=TRUE lockcomponents=FALSE outline 33979.99,18507.82 35179.99,18507.82 35179.99,20657.82 33979.99,20657.82
RoomDefinition BackplaneSlot10 [InComponentClass('BackplaneSlot10')] p5: confinementstyle=ConfineIn formatcopy=TRUE lockcomponents=FALSE outline 32428.5,18507.82 33781.5,18507.82 33781.5,20722.14 32428.5,20722.14
RoomDefinition BackplaneSlot9 [InComponentClass('BackplaneSlot9')] p6: confinementstyle=ConfineIn formatcopy=TRUE lockcomponents=FALSE outline 31036.5,18507.82 32379.99,18507.82 32379.99,20657.82 31036.5,20657.82
RoomDefinition BackplaneSlot8 [InComponentClass('BackplaneSlot8')] p7: confinementstyle=ConfineIn formatcopy=TRUE lockcomponents=FALSE outline 29779.99,18507.82 30979.99,18507.82 30979.99,20657.82 29779.99,20657.82
RoomDefinition BackplaneSlot7 [InComponentClass('BackplaneSlot7')] p8: confinementstyle=ConfineIn formatcopy=TRUE lockcomponents=FALSE outline 28379.99,18507.82 29579.99,18507.82 29579.99,20657.82 28379.99,20657.82
RoomDefinition BackplaneSlot6 [InComponentClass('BackplaneSlot6')] p9: confinementstyle=ConfineIn formatcopy=TRUE lockcomponents=FALSE outline 35380,23759 36580,23759 36580,25909 35380,25909
RoomDefinition BackplaneSlot5 [InComponentClass('BackplaneSlot5')] p10: confinementstyle=ConfineIn formatcopy=TRUE lockcomponents=FALSE outline 33980,23759 35180,23759 35180,25909 33980,25909
RoomDefinition BackplaneSlot4 [InComponentClass('BackplaneSlot4')] p11: confinementstyle=ConfineIn formatcopy=TRUE lockcomponents=FALSE outline 32580,23759 33780,23759 33780,25909 32580,25909
RoomDefinition BackplaneSlot3 [InComponentClass('BackplaneSlot3')] p12: confinementstyle=ConfineIn formatcopy=TRUE lockcomponents=FALSE outline 31004,23759 32380,23759 32380,25909 31004,25909
RoomDefinition BackplaneSlot2 [InComponentClass('BackplaneSlot2')] p13: confinementstyle=ConfineIn formatcopy=TRUE lockcomponents=FALSE outline 29780,23759 30980,23759 30980,25909 29780,25909
RoomDefinition BackplaneSlot1 [InComponentClass('BackplaneSlot1')] p14: confinementstyle=ConfineIn formatcopy=TRUE lockcomponents=FALSE outline 28380,23759 29580,23759 29580,25909 28380,25909
RoutingVias [All] p1: holewidth=28 width=50 viastyle="Through Hole" minholewidth=10 minwidth=20 maxholewidth=50 maxwidth=100
SilkToSilkClearance [All] p1: silktosilkclearance=2
SilkscreenOverComponentPads [All] p1: minsilkscreentomaskgap=0
SolderMaskExpansion [All] p1: expansion=4
Width [All] p1: maxlimit=200 minlimit=5 preferedwidth=10
21 further rules are at their usual default settings.

## Classes and differential pairs
component class "Power Supplies": BB1 BB2 BB3 BB4 BB5 BB6 C10 C11 C12 C13 C14 C15 C16 C17 C18 C19 C20 D1 L2 L3 P2 R1 R29 R30 R31 R32 R33 R34 R35 R36 R37 R38 R39 R40 TP1 TP2 TP3 TP6 TP7 TP8 TP9 TP17 TP27 TP28 TP29 U20 U21 U22 U23
component class BackplaneSlot12: C2L J1L K1L Q1L Q2L R4L TP10L TP11L U4L
component class BackplaneSlot11: C2K J1K K1K Q1K Q2K R4K TP10K TP11K U4K
component class BackplaneSlot10: C2J J1J K1J Q1J Q2J R4J TP10J TP11J U4J
component class BackplaneSlot9: C2I J1I K1I Q1I Q2I R4I TP10I TP11I U4I
component class BackplaneSlot8: C2H J1H K1H Q1H Q2H R4H TP10H TP11H U4H
component class BackplaneSlot7: C2G J1G K1G Q1G Q2G R4G TP10G TP11G U4G
component class BackplaneSlot6: C2F J1F K1F Q1F Q2F R4F TP10F TP11F U4F
component class BackplaneSlot5: C2E J1E K1E Q1E Q2E R4E TP10E TP11E U4E
component class BackplaneSlot4: C2D J1D K1D Q1D Q2D R4D TP10D TP11D U4D
component class BackplaneSlot3: C2C J1C K1C Q1C Q2C R4C TP10C TP11C U4C
component class BackplaneSlot2: C2B J1B K1B Q1B Q2B R4B TP10B TP11B U4B
component class BackplaneSlot1: C2A J1A K1A Q1A Q2A R4A TP10A TP11A U4A
component class "780-00029,rev1,Pg3,Backplane, Instrument Crate": C1 C3 C4 D2 D3 D4 D5 J2 J3 J4 L1 P1 P3 R2 R3 R5 R6 R7 R8 R9 R10 R11 RN1 RN2 RN3 S1 S2 TP4 TP5 TP12 TP13 U5
net class IMON_SLOT[1..12]: IMON_SLOT1 IMON_SLOT2 IMON_SLOT3 IMON_SLOT4 IMON_SLOT5 IMON_SLOT6 IMON_SLOT7 IMON_SLOT8 IMON_SLOT9 IMON_SLOT10 IMON_SLOT11 IMON_SLOT12
net class PWR_OFF[1..12]: PWR_OFF1 PWR_OFF2 PWR_OFF3 PWR_OFF4 PWR_OFF5 PWR_OFF6 PWR_OFF7 PWR_OFF8 PWR_OFF9 PWR_OFF10 PWR_OFF11 PWR_OFF12
net class PWR_ON[1..12]: PWR_ON1 PWR_ON2 PWR_ON3 PWR_ON4 PWR_ON5 PWR_ON6 PWR_ON7 PWR_ON8 PWR_ON9 PWR_ON10 PWR_ON11 PWR_ON12
channel class "780-00029,rev1,Pg2,Backplane, Instrument Crate": BackplaneSlot1 BackplaneSlot2 BackplaneSlot3 BackplaneSlot4 BackplaneSlot5 BackplaneSlot6 BackplaneSlot7 BackplaneSlot8 BackplaneSlot9 BackplaneSlot10 BackplaneSlot11 BackplaneSlot12

## Components (designator, comment, footprint, x,y, rotation, side; value= is the part's Value field where it differs from the comment)
BB1 "Bus Bar" "Bus Bar 1.5\" pitch" 35610,24069 r180 bottom
BB2 "Bus Bar" "Bus Bar 1.5\" pitch" 36710,18419 r90 bottom
BB3 "Bus Bar" "Bus Bar 1.5\" pitch" 35610,18819 r180 bottom locked
BB4 "Bus Bar" "Bus Bar 1.5\" pitch" 35610,25569 r180 bottom
BB5 "Bus Bar" "Bus Bar 1.5\" pitch" 36510,19919 r90 bottom
BB6 "Bus Bar" "Bus Bar 1.5\" pitch" 35610,20319 r180 bottom
C1 "1u" 2012[0805] 28977,26203.08 r270 bottom
C2A "Cap SMD" SMD_0805 28660,24859 r180 top (schematic designator C2)
C2B "Cap SMD" SMD_0805 30060,24859 r180 top (schematic designator C2)
C2C "Cap SMD" SMD_0805 31460,24859 r180 top (schematic designator C2)
C2D "Cap SMD" SMD_0805 32860,24859 r180 top (schematic designator C2)
C2E "Cap SMD" SMD_0805 34260,24859 r180 top (schematic designator C2)
C2F "Cap SMD" SMD_0805 35660,24859 r180 top (schematic designator C2)
C2G "Cap SMD" SMD_0805 28659.99,19607.82 r180 top (schematic designator C2)
C2H "Cap SMD" SMD_0805 30059.99,19607.82 r180 top (schematic designator C2)
C2I "Cap SMD" SMD_0805 31459.99,19607.82 r180 top (schematic designator C2)
C2J "Cap SMD" SMD_0805 32859.99,19607.82 r180 top (schematic designator C2)
C2K "Cap SMD" SMD_0805 34259.99,19607.82 r180 top (schematic designator C2)
C2L "Cap SMD" SMD_0805 35659.99,19607.82 r180 top (schematic designator C2)
C3 "Cap SMD" SMD_0805 32575,26289.08 r270 bottom
C4 "Cap SMD" SMD_0805 32575,26579.08 r90 bottom
C10 "1u" 2012[0805] 29820,18101 r180 bottom
C11 "Cap SMD" SMD_0805 32948.8,17913.34 r0 bottom
C12 "1u" 2012[0805] 29817,18281 r180 bottom
C13 "16V" SMD_0805 32523.8,18258.34 r180 bottom
C14 "Cap SMD" SMD_0805 33211.8,17863.34 r270 top
C15 "25V" SMD_0805 33203.8,18063.34 r90 bottom
C16 "16V" SMD_CAP_3216 30930,18148.6 r0 bottom
C17 "16V" SMD_CAP_3216 30925,17733.6 r0 bottom
C18 "Low ESR" SMD_1206 31753.98,17924 r0 bottom
C19 "Low ESR" SMD_1206 31509,17926.08 r180 bottom
C20 "Cap SMD" SMD_0805 31458.98,17719 r180 bottom
D1 "SL43-E3/57T" DO-214AB 32884.8,18156.32 r90 bottom
D2 "PESD3V3L4UG" SOT-353 31230,21126.6 r270 bottom
D3 "PESD3V3L4UG" SOT-353 31230,20896.6 r270 bottom
D4 "PESD3V3L4UG" SOT-353 31230,21011.6 r270 bottom
D5 "PESD3V3L4UG" SOT-353 31300,20751.6 r270 bottom
J1A "PESC-02-12-02-01-S-VT-LC" PESC-02-12-02-01-S-VT-LC 29175.51,24836.32 r0 top locked (schematic designator J1)
J1B "PESC-02-12-02-01-S-VT-LC" PESC-02-12-02-01-S-VT-LC 30575.51,24836.32 r0 top locked (schematic designator J1)
J1C "PESC-02-12-02-01-S-VT-LC" PESC-02-12-02-01-S-VT-LC 31975.51,24836.32 r0 top locked (schematic designator J1)
J1D "PESC-02-12-02-01-S-VT-LC" PESC-02-12-02-01-S-VT-LC 33375.51,24836.32 r0 top locked (schematic designator J1)
J1E "PESC-02-12-02-01-S-VT-LC" PESC-02-12-02-01-S-VT-LC 34775.51,24836.32 r0 top locked (schematic designator J1)
J1F "PESC-02-12-02-01-S-VT-LC" PESC-02-12-02-01-S-VT-LC 36175.51,24836.32 r0 top locked (schematic designator J1)
J1G "PESC-02-12-02-01-S-VT-LC" PESC-02-12-02-01-S-VT-LC 29175.5,19585.14 r0 top locked (schematic designator J1)
J1H "PESC-02-12-02-01-S-VT-LC" PESC-02-12-02-01-S-VT-LC 30575.5,19585.14 r0 top locked (schematic designator J1)
J1I "PESC-02-12-02-01-S-VT-LC" PESC-02-12-02-01-S-VT-LC 31975.5,19585.14 r0 top locked (schematic designator J1)
J1J "PESC-02-12-02-01-S-VT-LC" PESC-02-12-02-01-S-VT-LC 33375.5,19585.14 r0 top locked (schematic designator J1)
J1K "PESC-02-12-02-01-S-VT-LC" PESC-02-12-02-01-S-VT-LC 34775.5,19585.14 r0 top locked (schematic designator J1)
J1L "PESC-02-12-02-01-S-VT-LC" PESC-02-12-02-01-S-VT-LC 36175.5,19585.14 r0 top locked (schematic designator J1)
J2 "15-91-0140" HDR2X7 30705,26675.08 r270 bottom
J3 "RJHSE-3381" "RJ45, VERT MOUNT, NO MAGNETICS" 34763,26537.08 r90 bottom
J4 "61729-0010BLF" "USB Vertical PCB" 31819,26487.08 r0 bottom
K1A "Dual-Latching, 24V" "RELAY, TYCO RT1" 28810,25319 r270 bottom (schematic designator K1)
K1B "Dual-Latching, 24V" "RELAY, TYCO RT1" 30210,25319 r270 bottom (schematic designator K1)
K1C "Dual-Latching, 24V" "RELAY, TYCO RT1" 31610,25319 r270 bottom (schematic designator K1)
K1D "Dual-Latching, 24V" "RELAY, TYCO RT1" 33010,25319 r270 bottom (schematic designator K1)
K1E "Dual-Latching, 24V" "RELAY, TYCO RT1" 34410,25319 r270 bottom (schematic designator K1)
K1F "Dual-Latching, 24V" "RELAY, TYCO RT1" 35810,25319 r270 bottom (schematic designator K1)
K1G "Dual-Latching, 24V" "RELAY, TYCO RT1" 28809.99,20067.82 r270 bottom (schematic designator K1)
K1H "Dual-Latching, 24V" "RELAY, TYCO RT1" 30209.99,20067.82 r270 bottom (schematic designator K1)
K1I "Dual-Latching, 24V" "RELAY, TYCO RT1" 31609.99,20067.82 r270 bottom (schematic designator K1)
K1J "Dual-Latching, 24V" "RELAY, TYCO RT1" 33009.99,20067.82 r270 bottom (schematic designator K1)
K1K "Dual-Latching, 24V" "RELAY, TYCO RT1" 34409.99,20067.82 r270 bottom (schematic designator K1)
K1L "Dual-Latching, 24V" "RELAY, TYCO RT1" 35809.99,20067.82 r270 bottom (schematic designator K1)
L1 "S558-5999-J1-F" "10/100BT Magetics module" 34397,26564.08 r270 bottom
L2 "445-3869-1-ND" "Inductor TDC SLF" 32593.8,18063.34 r90 bottom
L3 "445-3872-2-ND" "Inductor TDC SLF" 31698.98,18154 r0 bottom
P1 "Header 4" "HDR1X4 for IDC" 32921,26335.08 r90 bottom
P2 "Header PWR 4 Pin" "HDR-4 PIN W/SCREW" 36023,26555.08 r180 bottom
P3 "COAX MMCX" MMCX2.54-V5 33696,26595.08 r180 bottom
Q1A "ZXMN3B14FTA" SOT-23B 28810,25604 r180 top (schematic designator Q1)
Q1B "ZXMN3B14FTA" SOT-23B 30210,25604 r180 top (schematic designator Q1)
Q1C "ZXMN3B14FTA" SOT-23B 31610,25604 r180 top (schematic designator Q1)
Q1D "ZXMN3B14FTA" SOT-23B 33010,25604 r180 top (schematic designator Q1)
Q1E "ZXMN3B14FTA" SOT-23B 34410,25604 r180 top (schematic designator Q1)
Q1F "ZXMN3B14FTA" SOT-23B 35810,25604 r180 top (schematic designator Q1)
Q1G "ZXMN3B14FTA" SOT-23B 28809.99,20352.82 r180 top (schematic designator Q1)
Q1H "ZXMN3B14FTA" SOT-23B 30209.99,20352.82 r180 top (schematic designator Q1)
Q1I "ZXMN3B14FTA" SOT-23B 31609.99,20352.82 r180 top (schematic designator Q1)
Q1J "ZXMN3B14FTA" SOT-23B 33009.99,20352.82 r180 top (schematic designator Q1)
Q1K "ZXMN3B14FTA" SOT-23B 34409.99,20352.82 r180 top (schematic designator Q1)
Q1L "ZXMN3B14FTA" SOT-23B 35809.99,20352.82 r180 top (schematic designator Q1)
Q2A "ZXMN3B14FTA" SOT-23B 28515,25804 r180 top (schematic designator Q2)
Q2B "ZXMN3B14FTA" SOT-23B 29915,25804 r180 top (schematic designator Q2)
Q2C "ZXMN3B14FTA" SOT-23B 31315,25804 r180 top (schematic designator Q2)
Q2D "ZXMN3B14FTA" SOT-23B 32715,25804 r180 top (schematic designator Q2)
Q2E "ZXMN3B14FTA" SOT-23B 34115,25804 r180 top (schematic designator Q2)
Q2F "ZXMN3B14FTA" SOT-23B 35515,25804 r180 top (schematic designator Q2)
Q2G "ZXMN3B14FTA" SOT-23B 28514.99,20552.82 r180 top (schematic designator Q2)
Q2H "ZXMN3B14FTA" SOT-23B 29914.99,20552.82 r180 top (schematic designator Q2)
Q2I "ZXMN3B14FTA" SOT-23B 31314.99,20552.82 r180 top (schematic designator Q2)
Q2J "ZXMN3B14FTA" SOT-23B 32945.5,20590.14 r180 top (schematic designator Q2)
Q2K "ZXMN3B14FTA" SOT-23B 34114.99,20552.82 r180 top (schematic designator Q2)
Q2L "ZXMN3B14FTA" SOT-23B 35514.99,20552.82 r180 top (schematic designator Q2)
R1 "Res 0805" SMD_0805 36062.48,26146.08 r0 bottom
R2 "Res 0805" SMD_0805 28977,26038.08 r90 bottom
R3 "Res 0805" SMD_0805 28908,26772.08 r0 bottom
R4A "Res 0805" SMD_0805 28510,24964 r270 top (schematic designator R4)
R4B "Res 0805" SMD_0805 29910,24964 r270 top (schematic designator R4)
R4C "Res 0805" SMD_0805 31310,24964 r270 top (schematic designator R4)
R4D "Res 0805" SMD_0805 32710,24964 r270 top (schematic designator R4)
R4E "Res 0805" SMD_0805 34110,24964 r270 top (schematic designator R4)
R4F "Res 0805" SMD_0805 35510,24964 r270 top (schematic designator R4)
R4G "Res 0805" SMD_0805 28509.99,19712.82 r270 top (schematic designator R4)
R4H "Res 0805" SMD_0805 29909.99,19712.82 r270 top (schematic designator R4)
R4I "Res 0805" SMD_0805 31309.99,19712.82 r270 top (schematic designator R4)
R4J "Res 0805" SMD_0805 32709.99,19712.82 r270 top (schematic designator R4)
R4K "Res 0805" SMD_0805 34109.99,19712.82 r270 top (schematic designator R4)
R4L "Res 0805" SMD_0805 35509.99,19712.82 r270 top (schematic designator R4)
R5 "4.7k" 2012[0805] 30456,26364.08 r270 bottom
R6 "Res 0805" SMD_0805 34981,26667.08 r180 top
R7 "Res 0805" SMD_0805 34994,26127.08 r180 top
R8 "Res 0805" SMD_0805 32750,26289.08 r270 bottom
R9 "Res 0805" SMD_0805 32660,26289.08 r90 bottom
R10 "Res 0805" SMD_0805 32750,26579.08 r90 bottom
R11 "Res 0805" SMD_0805 32665,26579.08 r270 bottom
R29 "Res 0805" SMD_0805 33053.8,18158.34 r0 top
R30 "Res 0805" SMD_0805 33118.8,18263.34 r270 bottom
R31 "Res 0805" SMD_0805 33198.8,18263.34 r270 bottom
R32 "Res 0805" SMD_0805 33123.8,17853.34 r270 bottom
R33 "Res 0805" SMD_0805 33213.8,17858.34 r90 bottom
R34 "Res 0805" SMD_0805 33123.8,17858.34 r90 top
R35 "Res 0805" SMD_0805 31593.98,17714 r0 top
R36 "Res 0805" SMD_0805 31458.98,17849 r180 bottom
R37 "Res 0805" SMD_0805 31523.98,17824 r270 top
R38 "Res 0805" SMD_0805 31413.98,18009 r0 bottom
R39 "Res 0805" SMD_0805 31458.98,17784 r0 bottom
R40 "Res 0805" SMD_0805 31777.98,17736 r90 bottom
RN1 "RES ARRAY  x4 10K" "RES ARRAY 0603 x 4" 32010,21346.6 r90 bottom
RN2 "RES ARRAY  x4 10K" "RES ARRAY 0603 x 4" 32040,21001.6 r90 bottom
RN3 "RES ARRAY  x4 10K" "RES ARRAY 0603 x 4" 32040,20821.6 r90 bottom
S1 "B3U-1000P" B3U-1000P 29157,26167 r180 bottom
S2 "B3U-1000P" B3U-1000P 29137,26771 r180 bottom
TP1 "Test point" PAD_80D_052H 29684,21041.08 r180 bottom
TP2 "Test point" PAD_80D_052H 30377,17695 r180 bottom
TP3 "Test point" PAD_80D_052H 35972,17806.08 r180 bottom
TP4 "Test Point SMD" "SMD_TEST POINT" 32435,26214.08 r90 bottom
TP5 "Test Point SMD" "SMD_TEST POINT" 32440,26669.08 r90 bottom
TP6 "Test point" PAD_80D_052H 35312,21091.08 r180 bottom
TP7 "Test point" PAD_80D_052H 29922,26872.08 r180 bottom
TP8 "Test point" PAD_80D_052H 35362,26908.08 r180 bottom
TP9 "Test Point SMD" "SMD_TEST POINT" 32967,26991.08 r270 bottom
TP10A "Test point" PAD_80D_052H 28711,23831 r0 bottom (schematic designator TP10)
TP10B "Test point" PAD_80D_052H 30111,23831 r0 bottom (schematic designator TP10)
TP10C "Test point" PAD_80D_052H 31074,24276 r0 bottom (schematic designator TP10)
TP10D "Test point" PAD_80D_052H 32911,23831 r0 bottom (schematic designator TP10)
TP10E "Test point" PAD_80D_052H 34311,23831 r0 bottom (schematic designator TP10)
TP10F "Test point" PAD_80D_052H 35711,23831 r0 bottom (schematic designator TP10)
TP10G "Test point" PAD_80D_052H 28710.99,18579.82 r0 bottom (schematic designator TP10)
TP10H "Test point" PAD_80D_052H 30110.99,18579.82 r0 bottom (schematic designator TP10)
TP10I "Test point" PAD_80D_052H 31510.99,18579.82 r0 bottom (schematic designator TP10)
TP10J "Test point" PAD_80D_052H 32910.99,18579.82 r0 bottom (schematic designator TP10)
TP10K "Test point" PAD_80D_052H 34310.99,18579.82 r0 bottom (schematic designator TP10)
TP10L "Test point" PAD_80D_052H 35710.99,18579.82 r0 bottom (schematic designator TP10)
TP11A "Test point" PAD_80D_052H 28695,25858 r0 bottom (schematic designator TP11)
TP11B "Test point" PAD_80D_052H 30095,25858 r0 bottom (schematic designator TP11)
TP11C "Test point" PAD_80D_052H 31495,25858 r0 bottom (schematic designator TP11)
TP11D "Test point" PAD_80D_052H 32895,25858 r0 bottom (schematic designator TP11)
TP11E "Test point" PAD_80D_052H 34295,25858 r0 bottom (schematic designator TP11)
TP11F "Test point" PAD_80D_052H 35695,25858 r0 bottom (schematic designator TP11)
TP11G "Test point" PAD_80D_052H 28694.99,20606.82 r0 bottom (schematic designator TP11)
TP11H "Test point" PAD_80D_052H 30094.99,20606.82 r0 bottom (schematic designator TP11)
TP11I "Test point" PAD_80D_052H 31105.5,20060.14 r0 bottom (schematic designator TP11)
TP11J "Test point" PAD_80D_052H 32495.5,20040.14 r0 bottom (schematic designator TP11)
TP11K "Test point" PAD_80D_052H 34294.99,20606.82 r0 bottom (schematic designator TP11)
TP11L "Test point" PAD_80D_052H 35694.99,20606.82 r0 bottom (schematic designator TP11)
TP12 "Test Point SMD" "SMD_TEST POINT" 33907,27006.08 r90 bottom
TP13 "Test Point SMD" "SMD_TEST POINT" 34249,27013.08 r90 bottom
TP17 "Test Point SMD" "SMD_TEST POINT" 31573,26989.08 r90 bottom
TP27 "Test Point SMD" "SMD_TEST POINT" 31066,26996.08 r90 bottom
TP28 "Test Point SMD" "SMD_TEST POINT" 32204,26978.08 r270 bottom
TP29 "Test Point SMD" "SMD_TEST POINT" 32585,26974.08 r90 bottom
U4A "100 V/V" SMD_SOT23_5 28655,24969 r270 top (schematic designator U4)
U4B "100 V/V" SMD_SOT23_5 30055,24969 r270 top (schematic designator U4)
U4C "100 V/V" SMD_SOT23_5 31455,24969 r270 top (schematic designator U4)
U4D "100 V/V" SMD_SOT23_5 32855,24969 r270 top (schematic designator U4)
U4E "100 V/V" SMD_SOT23_5 34255,24969 r270 top (schematic designator U4)
U4F "100 V/V" SMD_SOT23_5 35655,24969 r270 top (schematic designator U4)
U4G "100 V/V" SMD_SOT23_5 28654.99,19717.82 r270 top (schematic designator U4)
U4H "100 V/V" SMD_SOT23_5 30054.99,19717.82 r270 top (schematic designator U4)
U4I "100 V/V" SMD_SOT23_5 31454.99,19717.82 r270 top (schematic designator U4)
U4J "100 V/V" SMD_SOT23_5 32854.99,19717.82 r270 top (schematic designator U4)
U4K "100 V/V" SMD_SOT23_5 34254.99,19717.82 r270 top (schematic designator U4)
U4L "100 V/V" SMD_SOT23_5 35654.99,19717.82 r270 top (schematic designator U4)
U5 "SuperFin Module" "SuperFin Footprint" 30995.5,20550.14 r90 bottom locked
U20 "Voltage Reg, Fixed" "TO-252(D-PAK)  POWERPAD" 30148,18190 r0 bottom
U21 "LT3682" DD12/DFN12 33148.8,17953.34 r90 bottom
U22 "LTC1144" S8_M 30935,17933.6 r90 bottom
U23 "LTC3631" DD8/DFN8 31638.98,17809 r180 bottom
? "Comment" "TARGET MECHANICAL 5" 27996,16624 r90 top
? "Comment" "TARGET MECHANICAL 5" 28035,27703 r90 top
? "Comment" "TARGET MECHANICAL 5" 36851,27683 r90 top

## Footprints (in the part's own frame and the unit in brackets; to place one, negate y for a bottom-side part, rotate by r counter-clockwise, add the part's x,y. Pads: shape width x height; smd on the part's side, far side on the other; paste and mask are expansions set on the pad)
"10/100BT Magetics module" [mil] "bel p/n S558-6-5999-J1-F"
  rect 25x70 smd: 1(0,0) 2(50,0) 3(100,0) 4(150,0) 5(200,0) 6(250,0) 7(300,0) 8(350,0) 9(350,355) 10(300,355) 11(250,355) 12(200,355) 13(150,355) 14(100,355) 15(50,355) 16(0,355)
  silkscreen extent -50,5 375,300
2012[0805] [mm] "Chip Resistor; Body 2.0 x 1.3 mm (LxW typ)"
  rect 1.3x1.5 smd: 1(-0.95,0) 2(0.95,0)
B3U-1000P [mil] "Pushbutton without ground terminal, without boss"
  rect 40x67 smd: 1(-71,0) 2(71,0)
  silkscreen extent -45,-50 45,50
"Bus Bar 1.5\" pitch" [mil] "Rigid/Bus Bar"
  round 110 hole 70: 1(0,0) 1(1500,0) 1(3000,0) 1(4500,0) 1(6000,0)
  silkscreen extent -100,-40 6100,40
DD8/DFN8 [mm]
  oval 0.675x0.25 smd: 1(-1.412,0.75) 2(-1.412,0.25) 3(-1.412,-0.25) 4(-1.412,-0.75) 5(1.412,-0.75) 6(1.412,-0.25) 7(1.412,0.25) 8(1.412,0.75)
  rect 1.65x2.38 smd: 9(0,0)
  silkscreen extent -2.43,-1.55 1.55,1.62, body extent -1.55,-1.55 1.55,1.55, height 0.8
DD12/DFN12 [mm] "SON, 12-Leads, Body 3x3 mm, Pitch 0.45mm, IPC High Density"
  oval 0.6x0.25 smd: 1(0,0) 2(0,-0.45) 3(0,-0.9) 4(0,-1.35) 5(0,-1.8) 6(0,-2.25) 7(2.9,-2.25) 8(2.9,-1.8) 9(2.9,-1.35) 10(2.9,-0.9) 11(2.9,-0.45) 12(2.9,0)
  rect 1.65x2.38 smd: 13(1.45,-1.125)
  silkscreen extent -0.97,-2.68 3,0.5, body extent -0.1,-2.68 3,0.42, height 0.8
DO-214AB [mil] "DO-214-AB/SMC; 2 C-Bend Leads; Body 7.9 x 5.9 mm, inc. leads (LxW)"
  rect 60x126 smd: 1(-121.81,0) 2(121.81,0)
  silkscreen extent -170,-120 179,120
"HDR1X4 for IDC" [mm] "Connector; Header; 4 Position"
  rect 1.5x1.5 hole 0.9: 1(0,0)
  round 1.5 hole 0.9: 2(2.54,0) 3(5.08,0) 4(7.62,0)
  silkscreen extent -1.4,-2.54 8.89,2.54
HDR2X7 [mm] "Connector; Header; 7x2 Position"
  rect 1.5x1.5 hole 0.9: 1(0,0)
  round 1.5 hole 0.9: 2(0,2.54) 3(2.54,0) 4(2.54,2.54) 5(5.08,0) 6(5.08,2.54) 7(7.62,0) 8(7.62,2.54) 9(10.16,0) 10(10.16,2.54) 11(12.7,0) 12(12.7,2.54) 13(15.24,0) 14(15.24,2.54)
  silkscreen extent -1.27,-1.27 16.51,3.81
"HDR-4 PIN W/SCREW" [mm] "TYCO p/n 796867-4"
  rect 2.5x2.5 hole 1.5: 1(-7.62,0)
  round 2.5 hole 1.5: 2(-2.54,0) 3(2.54,0) 4(7.62,0)
  silkscreen extent -15.16,-6.25 15.24,6.25
"Inductor TDC SLF" [mm] "SLF series"
  rect 2.2x1.5 smd: 1(0,3.2) 2(0,-3.2)
  silkscreen extent -3.5,-3.5 3.5,3.5
MMCX2.54-V5 [mm] "Connector; RF Coaxial, MMCX, Thru-Hole; 5 Position; Vertical"
  round 1.4 hole 0.85: 1(0,0) 2(-1.27,-1.27) 3(1.27,-1.27) 4(1.27,1.27) 5(-1.27,1.27)
  silkscreen extent -1.75,-1.75 1.75,1.75
PAD_80D_052H [mil]
  round 80 hole 52: 1(0,0)
PESC-02-12-02-01-S-VT-LC [mil] "SAMTEC FEM SOCKETS, PWR(4), SIGNAL(12), VERT MOUNT"
  round 59.06 hole 98 unplated: 0(-87,-875) 0(-87,875)
  round 65 hole 40: 1(-150,-100) 2(-50,-100) 3(50,-100) 4(150,-100) 5(-150,0) 6(-50,0) 7(50,0) 8(150,0) 9(-150,100) 10(-50,100) 11(50,100) 12(150,100)
  round 80 hole 52: 13(-150,-625) 13(-150,-525) 13(-50,-625) 13(-50,-525) 13(50,-625) 13(50,-525) 13(150,-625) 13(150,-525) 14(-150,-375) 14(-150,-275) 14(-50,-375) 14(-50,-275) 14(50,-375) 14(50,-275) 14(150,-375) 14(150,-275) 15(-150,275) 15(-150,375) 15(-50,275) 15(-50,375) 15(50,275) 15(50,375) 15(150,275) 15(150,375) 16(-150,525) 16(-150,625) 16(-50,525) 16(-50,625) 16(50,525) 16(50,625) 16(150,525) 16(150,625)
  silkscreen extent -225,-1025 250,1025
"RELAY, TYCO RT1" [mm] "TYCO/SCHRACK RT314F24"
  rect 2.5x2.5 hole 1.3: 1(0,0)
  round 2.5 hole 1.3: 2(0,7.5) 3(0,3.75) 11(20,0) 11(20,7.5) 12(15,0) 12(15,7.5) 14(25,0) 14(25,7.5)
  silkscreen extent -2.5,-2.5 27.5,10
"RES ARRAY 0603 x 4" [mm]
  rect 0.44x1.15 smd: 1(0,0.1) 2(0,2.05) 3(0.8,0.1) 4(0.8,2.05) 5(1.6,0.1) 6(1.6,2.05) 7(2.4,0.1) 8(2.4,2.05)
  silkscreen extent -0.6,-0.6 3,1.8
"RJ45, VERT MOUNT, NO MAGNETICS" [mil] "Amphenol p/n RJHSE-3381"
  rect 55x55 hole 35: 1(0,0)
  round 55 hole 35: 2(-40,-100) 3(-80,0) 4(-120,-100) 5(-160,0) 6(-200,-100) 7(-240,0) 8(-280,-100) 9(130,95) 10(40,95) 11(-320,95) 12(-410,95)
  round 85 hole 62: 13(180,32) 14(-460,32)
  round 116.14 hole 127.95 unplated: MH1(110,-135) MH2(-390,-135)
  silkscreen extent -460,-235 180,305
S8_M [mm] "SOIC, 8-Leads, Body 4.9x3.9mm, Pitch 1.27mm, IPC Low Density"
  oval 2.5x0.7 smd: 1(-2.45,1.905) 2(-2.45,0.635) 3(-2.45,-0.635) 4(-2.45,-1.905) 5(2.45,-1.905) 6(2.45,-0.635) 7(2.45,0.635) 8(2.45,1.905)
  silkscreen extent -2.57,-2.5 0.8,2.93, body extent -2,-2.5 2,2.5, height 1.76
SMD_0805 [mil]
  rect 50x50 smd: 1(-45,0) 2(45,0)
  silkscreen extent -1,-1 1,1
SMD_1206 [mil]
  rect 63x75 smd: 1(-55,0) 2(55,0)
SMD_CAP_3216 [mil]
  rect 78x48 smd: 1(55,0) 2(-55,0)
  silkscreen extent -108,-65 134,38
SMD_SOT23_5 [mil]
  rect 28x36 smd: 1(37,43) 2(0,43) 3(-37,43)
  rect 36x36 smd: 4(-37,-43) 5(37,-43)
  silkscreen extent -57,-25 57,85
"SMD_TEST POINT" [mil] "Keystone 5015"
  rect 135x70 smd: 1(0,0)
SOT-23B [mm] "SOT-23; 3 Leads; Body 3.0 x 2.6 mm, inc. leads (LxW max)"
  rect 0.9x0.95 smd: 1(-0.95,-1.25) 2(0.95,-1.25) 3(0,1.25)
  silkscreen extent -2.08,-1.37 1.3,1.25
SOT-353 [mm]
  rect 0.5x0.5 smd: 1(0,0) 3(0,-1.5) 4(1.8,-1.5) 5(1.8,0)
  rect 0.5x0.4 smd: 2(0,-0.75)
  silkscreen extent 0.5,-1.9 2.3,0.4
"SuperFin Footprint" [mm] "SAMTEC QTH-060-01-L-D-A (x2)"
  round 5.6 hole 4.22: 0(0,43) 0(84,0) 0(84,43)
  round 1 hole 1.02 unplated: 0(38.04,13.08) 0(38.04,33.15) 1(-0.44,13.08) 1(-0.44,33.15)
  rect 0.3x1.45 smd paste+0 mask+0.05: A1(36.05,12.03) A2(36.05,18.21) A3(35.55,12.03) A4(35.55,18.21) A5(35.05,12.03) A6(35.05,18.21) A7(34.55,12.03) A8(34.55,18.21) A9(34.05,12.03) A10(34.05,18.21) A11(33.55,12.03) A12(33.55,18.21) A13(33.05,12.03) A14(33.05,18.21) A15(32.55,12.03) A16(32.55,18.21) A17(32.05,12.03) A18(32.05,18.21) A19(31.55,12.03) A20(31.55,18.21) A21(31.05,12.03) A22(31.05,18.21) A23(30.55,12.03) A24(30.55,18.21) A25(30.05,12.03) A26(30.05,18.21) A27(29.55,12.03) A28(29.55,18.21) A29(29.05,12.03) A30(29.05,18.21) A31(28.55,12.03) A32(28.55,18.21) A33(28.05,12.03) A34(28.05,18.21) A35(27.55,12.03) A36(27.55,18.21) A37(27.05,12.03) A38(27.05,18.21) A39(26.55,12.03) A40(26.55,18.21) A41(26.05,12.03) A42(26.05,18.21) A43(25.55,12.03) A44(25.55,18.21) A45(25.05,12.03) A46(25.05,18.21) A47(24.55,12.03) A48(24.55,18.21) A49(24.05,12.03) A50(24.05,18.21) A51(23.55,12.03) A52(23.55,18.21) A53(23.05,12.03) A54(23.05,18.21) A55(22.55,12.03) A56(22.55,18.21) A57(22.05,12.03) A58(22.05,18.21) A59(21.55,12.03) A60(21.55,18.21) A61(16.05,12.03) A62(16.05,18.21) A63(15.55,12.03) A64(15.55,18.21) A65(15.05,12.03) A66(15.05,18.21) A67(14.55,12.03) A68(14.55,18.21) A69(14.05,12.03) A70(14.05,18.21) A71(13.55,12.03) A72(13.55,18.21) A73(13.05,12.03) A74(13.05,18.21) A75(12.55,12.03) A76(12.55,18.21) A77(12.05,12.03) A78(12.05,18.21) A79(11.55,12.03) A80(11.55,18.21) A81(11.05,12.03) A82(11.05,18.21) A83(10.55,12.03) A84(10.55,18.21) A85(10.05,12.03) A86(10.05,18.21) A87(9.55,12.03) A88(9.55,18.21) A89(9.05,12.03) A90(9.05,18.21) A91(8.55,12.03) A92(8.55,18.21) A93(8.05,12.03) A94(8.05,18.21) A95(7.55,12.03) A96(7.55,18.21) A97(7.05,12.03) A98(7.05,18.21) A99(6.55,12.03) A100(6.55,18.21) A101(6.05,12.03) A102(6.05,18.21) A103(5.55,12.03) A104(5.55,18.21) A105(5.05,12.03) A106(5.05,18.21) A107(4.55,12.03) A108(4.55,18.21) A109(4.05,12.03) A110(4.05,18.21) A111(3.55,12.03) A112(3.55,18.21) A113(3.05,12.03) A114(3.05,18.21) A115(2.55,12.03) A116(2.55,18.21) A117(2.05,12.03) A118(2.05,18.21) A119(1.55,12.03) A120(1.55,18.21) B1(36.05,32.1) B2(36.05,38.28) B3(35.55,32.1) B4(35.55,38.28) B5(35.05,32.1) B6(35.05,38.28) B7(34.55,32.1) B8(34.55,38.28) B9(34.05,32.1) B10(34.05,38.28) B11(33.55,32.1) B12(33.55,38.28) B13(33.05,32.1) B14(33.05,38.28) B15(32.55,32.1) B16(32.55,38.28) B17(32.05,32.1) B18(32.05,38.28) B19(31.55,32.1) B20(31.55,38.28) B21(31.05,32.1) B22(31.05,38.28) B23(30.55,32.1) B24(30.55,38.28) B25(30.05,32.1) B26(30.05,38.28) B27(29.55,32.1) B28(29.55,38.28) B29(29.05,32.1) B30(29.05,38.28) B31(28.55,32.1) B32(28.55,38.28) B33(28.05,32.1) B34(28.05,38.28) B35(27.55,32.1) B36(27.55,38.28) B37(27.05,32.1) B38(27.05,38.28) B39(26.55,32.1) B40(26.55,38.28) B41(26.05,32.1) B42(26.05,38.28) B43(25.55,32.1) B44(25.55,38.28) B45(25.05,32.1) B46(25.05,38.28) B47(24.55,32.1) B48(24.55,38.28) B49(24.05,32.1) B50(24.05,38.28) B51(23.55,32.1) B52(23.55,38.28) B53(23.05,32.1) B54(23.05,38.28) B55(22.55,32.1) B56(22.55,38.28) B57(22.05,32.1) B58(22.05,38.28) B59(21.55,32.1) B60(21.55,38.28) B61(16.05,32.1) B62(16.05,38.28) B63(15.55,32.1) B64(15.55,38.28) B65(15.05,32.1) B66(15.05,38.28) B67(14.55,32.1) B68(14.55,38.28) B69(14.05,32.1) B70(14.05,38.28) B71(13.55,32.1) B72(13.55,38.28) B73(13.05,32.1) B74(13.05,38.28) B75(12.55,32.1) B76(12.55,38.28) B77(12.05,32.1) B78(12.05,38.28) B79(11.55,32.1) B80(11.55,38.28) B81(11.05,32.1) B82(11.05,38.28) B83(10.55,32.1) B84(10.55,38.28) B85(10.05,32.1) B86(10.05,38.28) B87(9.55,32.1) B88(9.55,38.28) B89(9.05,32.1) B90(9.05,38.28) B91(8.55,32.1) B92(8.55,38.28) B93(8.05,32.1) B94(8.05,38.28) B95(7.55,32.1) B96(7.55,38.28) B97(7.05,32.1) B98(7.05,38.28) B99(6.55,32.1) B100(6.55,38.28) B101(6.05,32.1) B102(6.05,38.28) B103(5.55,32.1) B104(5.55,38.28) B105(5.05,32.1) B106(5.05,38.28) B107(4.55,32.1) B108(4.55,38.28) B109(4.05,32.1) B110(4.05,38.28) B111(3.55,32.1) B112(3.55,38.28) B113(3.05,32.1) B114(3.05,38.28) B115(2.55,32.1) B116(2.55,38.28) B117(2.05,32.1) B118(2.05,38.28) B119(1.55,32.1) B120(1.55,38.28)
  rect 2.54x0.64 smd: A121(20.355,15.12) A121(37.245,15.12) A122(0.355,15.12) A122(17.245,15.12) B121(20.355,35.19) B121(37.245,35.19) B122(0.355,35.19) B122(17.245,35.19)
  rect 4.7x0.64 smd: A121(25.625,15.12) A121(31.975,15.12) A122(5.625,15.12) A122(11.975,15.12) B121(25.625,35.19) B121(31.975,35.19) B122(5.625,35.19) B122(11.975,35.19)
  silkscreen extent -3,-3.5 87,46.5
"TARGET MECHANICAL 5" [mil]
"TO-252(D-PAK)  POWERPAD" [mil] "D-PAK, 3-Pads, Body 6.2x6.7mm (max), IPC Medium Density"
  rect 74.8x37.4 smd: 1(-171.26,89.76) 3(-171.26,-89.76)
  round 20 hole 10: 2(-39.37,-78.74) 2(-39.37,-19.69) 2(-39.37,39.37) 2(-39.37,98.43) 2(19.69,-98.43) 2(19.69,-39.37) 2(19.69,19.69) 2(19.69,78.74) 2(78.74,-78.74) 2(78.74,-19.69) 2(78.74,39.37) 2(78.74,98.43) 2(137.8,-98.43) 2(137.8,-39.37) 2(137.8,19.69) 2(137.8,78.74)
  rect 271.65x267.72 smd: 2(59.06,0)
  silkscreen extent -176,-132 -79,135, body extent -98,-132 146,132, height 94
"USB Vertical PCB" [mm] "EDAC USB typeB p/n 690-004-260-023"
  round 2 hole 0.92: 1(-4.77,2.71) 2(-7.27,2.71) 3(-7.27,-0.49) 4(-4.77,-0.49)
  round 4 hole 2.3: 5(-12.04,0) 6(0,0)
  silkscreen extent -12,-4.6 0,6.6

## Part data
C1 C10 C12: library part Cap, "Capacitor"
C2A C2B C2C C2D C2E C2F C2G C2H C2I C2J C2K C2L C3 C4 C11 C14 C20: "Capacitor"
C13 C15 C18 C19: library part "Cap SMD", "Capacitor"
C16 C17: library part "Cap Tant 16V", "outline 3.2mm x 1.6mm"
D1: library part Diode, "Default Diode"
D2 D3 D4 D5: library part "ESD Diode 3.3V Quad", "Quad ESD Diode 3.3V"
J1A J1B J1C J1D J1E J1F J1G J1H J1I J1J J1K J1L: "SAMTEC, SIGNAL(12)+PWR(4), VERT"
J2: library part "Header 7X2", "Header, 7-Pin, Dual row"
J3: library part "CONN RJ-45 w/o magnetics", "Vertical PC mount, w/o magnetics"
J4: library part "Header 6", "Header, 6-Pin"
K1A K1B K1C K1D K1E K1F K1G K1H K1I K1J K1K K1L: library part "Relay SPDT, 16A", "Tyco/Schrack RT314F24, Dual Latching"
L1: library part "Ethernet Magnetics module", "10/100BT Magnetics Module"
L2 L3: library part "Inductor SMD 10uH 1.8A", "Inductor"
P1: "Header, 4-Pin"
P2: library part "Header 4 PWR", "Header, 4-Pin"
P3: library part COAX-M, "RF Coaxial PCB Connector, MMCX; Thru-Hole, Vertical Mount Plug,  50 Ohm Impedance"
Q1A Q1B Q1C Q1D Q1E Q1F Q1G Q1H Q1I Q1J Q1K Q1L Q2A Q2B Q2C Q2D Q2E Q2F Q2G Q2H Q2I Q2J Q2K Q2L: library part MOSFET-N, "N-Channel MOSFET"
R1 R2 R3 R4A R4B R4C R4D R4E R4F R4G R4H R4I R4J R4K R4L R6 R7 R8 R9 R10 R11 R29 R30 R31 R32 R33 R34 R35 R36 R37 R38 R39 R40: library part "Res SMD", "Resistor 0805"
R5: library part Res3, "Resistor"
RN1 RN2 RN3: "Resistor Array 4 Isolated"
S1 S2: library part SW-PB, "Switch"
TP1 TP2 TP3 TP6 TP7 TP8 TP10A TP10B TP10C TP10D TP10E TP10F TP10G TP10H TP10I TP10J TP10K TP10L TP11A TP11B TP11C TP11D TP11E TP11F TP11G TP11H TP11I TP11J TP11K TP11L: "Test Point"
TP4 TP5 TP9 TP12 TP13 TP17 TP27 TP28 TP29: "SMD loop test point"
U4A U4B U4C U4D U4E U4F U4G U4H U4I U4J U4K U4L: library part INA195, "Current Shunt Monitor"
U20: "MC78M05"
U21: "1A uPwr Step-Down switching regulator"
U22: "IC VOLT CONV SW-CAP W/SHTDN8SOIC"
U23: "IC CONV STP-DWN ADJ 8-DFN"

## Free pads (board coordinates)
  round 216.54 hole 127.95: 0(29110,17288.29) 0(30510,17288.29) 0(31910,17288.29) 0(33310,17288.29) 0(34710,17288.29) 0(36110,17288.29) 2(29710,21881.6) 2(30910,21881.6) 2(31910,21881.6) 2(33110,21881.6) 2(34110,21881.6) 2(35110,21881.6) 2(36310,21881.6) 3(29710,22539.08) 3(31110,22539.08) 3(32510,22539.08) 3(33910,22539.08) 3(35310,22539.08) 3(36310,22539.08) 4(29110,27132.78) 4(30510,27132.78) 4(31910,27132.78) 4(33310,27132.78) 4(34710,27132.78) 4(36110,27132.78)
  round 200 hole 127.95: 2(28510,21881.6) 3(28510,22539.08)

## Via types
v1: diameter 20, hole 10, Top Layer (*.GTL) to Bottom Layer (*.GBL), 337 vias
v2: diameter 24, hole 10, Top Layer (*.GTL) to Bottom Layer (*.GBL), 48 vias
v3: diameter 50, hole 28, Top Layer (*.GTL) to Bottom Layer (*.GBL), 26 vias
v4: diameter 25.98, hole 12.99, Top Layer (*.GTL) to Bottom Layer (*.GBL), tented top, 4 vias

## Nets (pads, with @x,y where several pads share a name; then routed paths per layer and width w, separated by ;. In a path a pad name is that pad's centre, name@x,y a point inside that pad or via, vN(x,y) a via of type N, cw(c..) or ccw(c..) an arc to the next point about the centre after c; other vN are vias at no path point)
+3.3V: C1.1 C13.2 J1A.11 J1B.11 J1C.11 J1D.11 J1E.11 J1F.11 J1G.11 J1H.11 J1I.11 J1J.11 J1K.11 J1L.11 L2.2 R5.2 R32.2 S1.1 S2.1 TP27.1 U5.B121 U21.5 | length 1231.5
  Bottom Layer (*.GBL) w5: v1(30453,26275.08) 30456,26278.08 R5.2@30456,26326.68
  Bottom Layer (*.GBL) w10: C1.1@28977,26240.48 29154.52,26240.48 S1.1@29228,26167 29290.92,26167 v1(29293,26169.08) ; S2.1@29208,26771 29252.92,26771 v1(29254,26772.08) ; v1(30989,26996.08) TP27.1@31066,26996.08 ; U5.B121@32380.93,21351.52 v1@32380.93,21443.01 ; U5.B121@32380.93,22016.48 U5.B121@32380.93,21809 U5.B121@32380.93,21559 32380.93,21443.15 v1(32381,21443.08) ; v2(33123.8,17765.34) R32.2@33123.8,17808.34
  other v2: 32553.8,17898.34 32618.8,17898.34 32478.8,17903.34 32618.8,18003.34 32618.8,18058.34 32618.8,18108.34 32618.8,18158.34 32493.8,18163.34 32463.8,18328.34 32518.8,18328.34
+5V: C12.1 TP17.1 U5.A1 U20.3 | length 12457.4
  Top Layer (*.GTL) w5: v1(29848,22103.08) 29929,22184.08 v1(31006,22184.08) ; v1(31003,26737.08) v1(31572,26737.08)
  Mid-Layer 1 (*.G1) w25: v1(29848,22103.08) 29848,22090.08 29886,22052.08 31430,22052.08 v1@31469,22091.08
  Bottom Layer (*.GBL) w5: v1(31003,26737.08) 31003,26208.08 31175,26036.08 31175,23834.08 30985,23644.08 30985,22430.08 31006,22409.08 v1(31006,22184.08) ; v1(31572,26737.08) 31572,26988.08 TP17.1@31573,26989.08
  Bottom Layer (*.GBL) w20: U5.A1@31469.12,21972.25 31469.12,22064.48
  Bottom Layer (*.GBL) w25: v1@29851,22103.08 29851,20100.64 29849,20098.64 29849,19056.35 29852.6,19052.75 29852.6,18282.8 C12.1@29854.4,18281 29855.64,18279.76 U20.3@29976.74,18279.76 ; v1@31469,22091.08 31469,22064.6 31469.12,22064.48
  other v1: 31472,22097.08
+12V: C2A.2 C2B.2 C2C.2 C2D.2 C2E.2 C2F.2 C2G.2 C2H.2 C2I.2 C2J.2 C2K.2 C2L.2 C10.1 C19.2 C20.2 L3.2 R8.2 R10.2 R36.2 R38.2 TP29.1 U4A.5 U4B.5 U4C.5 U4D.5 U4E.5 U4F.5 U4G.5 U4H.5 U4I.5 U4J.5 U4K.5 U4L.5 U5.A5 U20.1 U22.8 | length 2405.4
  Top Layer (*.GTL) w10: U4G.5@28611.99,19680.82 28611.99,19610.82 C2G.2@28614.99,19607.82 v1(28614.99,19552.82) ; U4A.5@28612,24932 28612,24862 C2A.2@28615,24859 v1(28615,24804) ; U4H.5@30011.99,19680.82 30011.99,19610.82 C2H.2@30014.99,19607.82 v1(30014.99,19552.82) ; U4B.5@30012,24932 30012,24862 C2B.2@30015,24859 v1(30015,24804) ; U4I.5@31411.99,19680.82 31411.99,19610.82 C2I.2@31414.99,19607.82 v1(31414.99,19552.82) ; U4C.5@31412,24932 31412,24862 C2C.2@31415,24859 v1(31415,24804) ; U4J.5@32811.99,19680.82 32811.99,19610.82 C2J.2@32814.99,19607.82 v1(32814.99,19552.82) ; U4D.5@32812,24932 32812,24862 C2D.2@32815,24859 v1(32815,24804) ; U4K.5@34211.99,19680.82 34211.99,19610.82 C2K.2@34214.99,19607.82 v1(34214.99,19552.82) ; U4E.5@34212,24932 34212,24862 C2E.2@34215,24859 v1(34215,24804) ; U4L.5@35611.99,19680.82 35611.99,19610.82 C2L.2@35614.99,19607.82 v1(35614.99,19552.82) ; U4F.5@35612,24932 35612,24862 C2F.2@35615,24859 v1(35615,24804)
  Bottom Layer (*.GBL) w10: U5.A5@31469.12,21930.06 31521.02,21930.06 31528,21923.08 31528,21899.64 31561.5,21866.14 31561.5,21666.58 v1(31567,21661.08) ; v1(32503,26974.08) TP29.1@32585,26974.08 ; v1(32750,26179.08) R8.2@32750,26244.08 ; R10.2@32750,26624.08 v1(32750,26699.08)
  Bottom Layer (*.GBL) w20: v1(29859,18028) 29857.4,18029.6 C10.1@29857.4,18101 29858.17,18100.24 U20.1@29976.74,18100.24 ; v2(31363.98,17719) C20.2@31413.98,17719
  Bottom Layer (*.GBL) w30: U22.8@31010,18030.06 31058.46,18030.06 v2(31059,18030.6)
  other v2: 31557.98,18017 31607.98,18017 31513.98,18018 31727.98,18184 31645.98,18185 31537.98,18187 31438.98,18188